# Altium PCB Kasli_BP_Adapter.PCBDOC (part 1 of 3)
Units mm, origin at the board's own origin, x right, y up, seen from the top; angles counter-clockwise.
Board outline 52.2 x 100 mm, 4 copper layers (TopLayer, MP(G), MidLayer1, BottomLayer), stack 1.65 mm thick; 18 components, 82 nets, 256 pads, 42 vias.
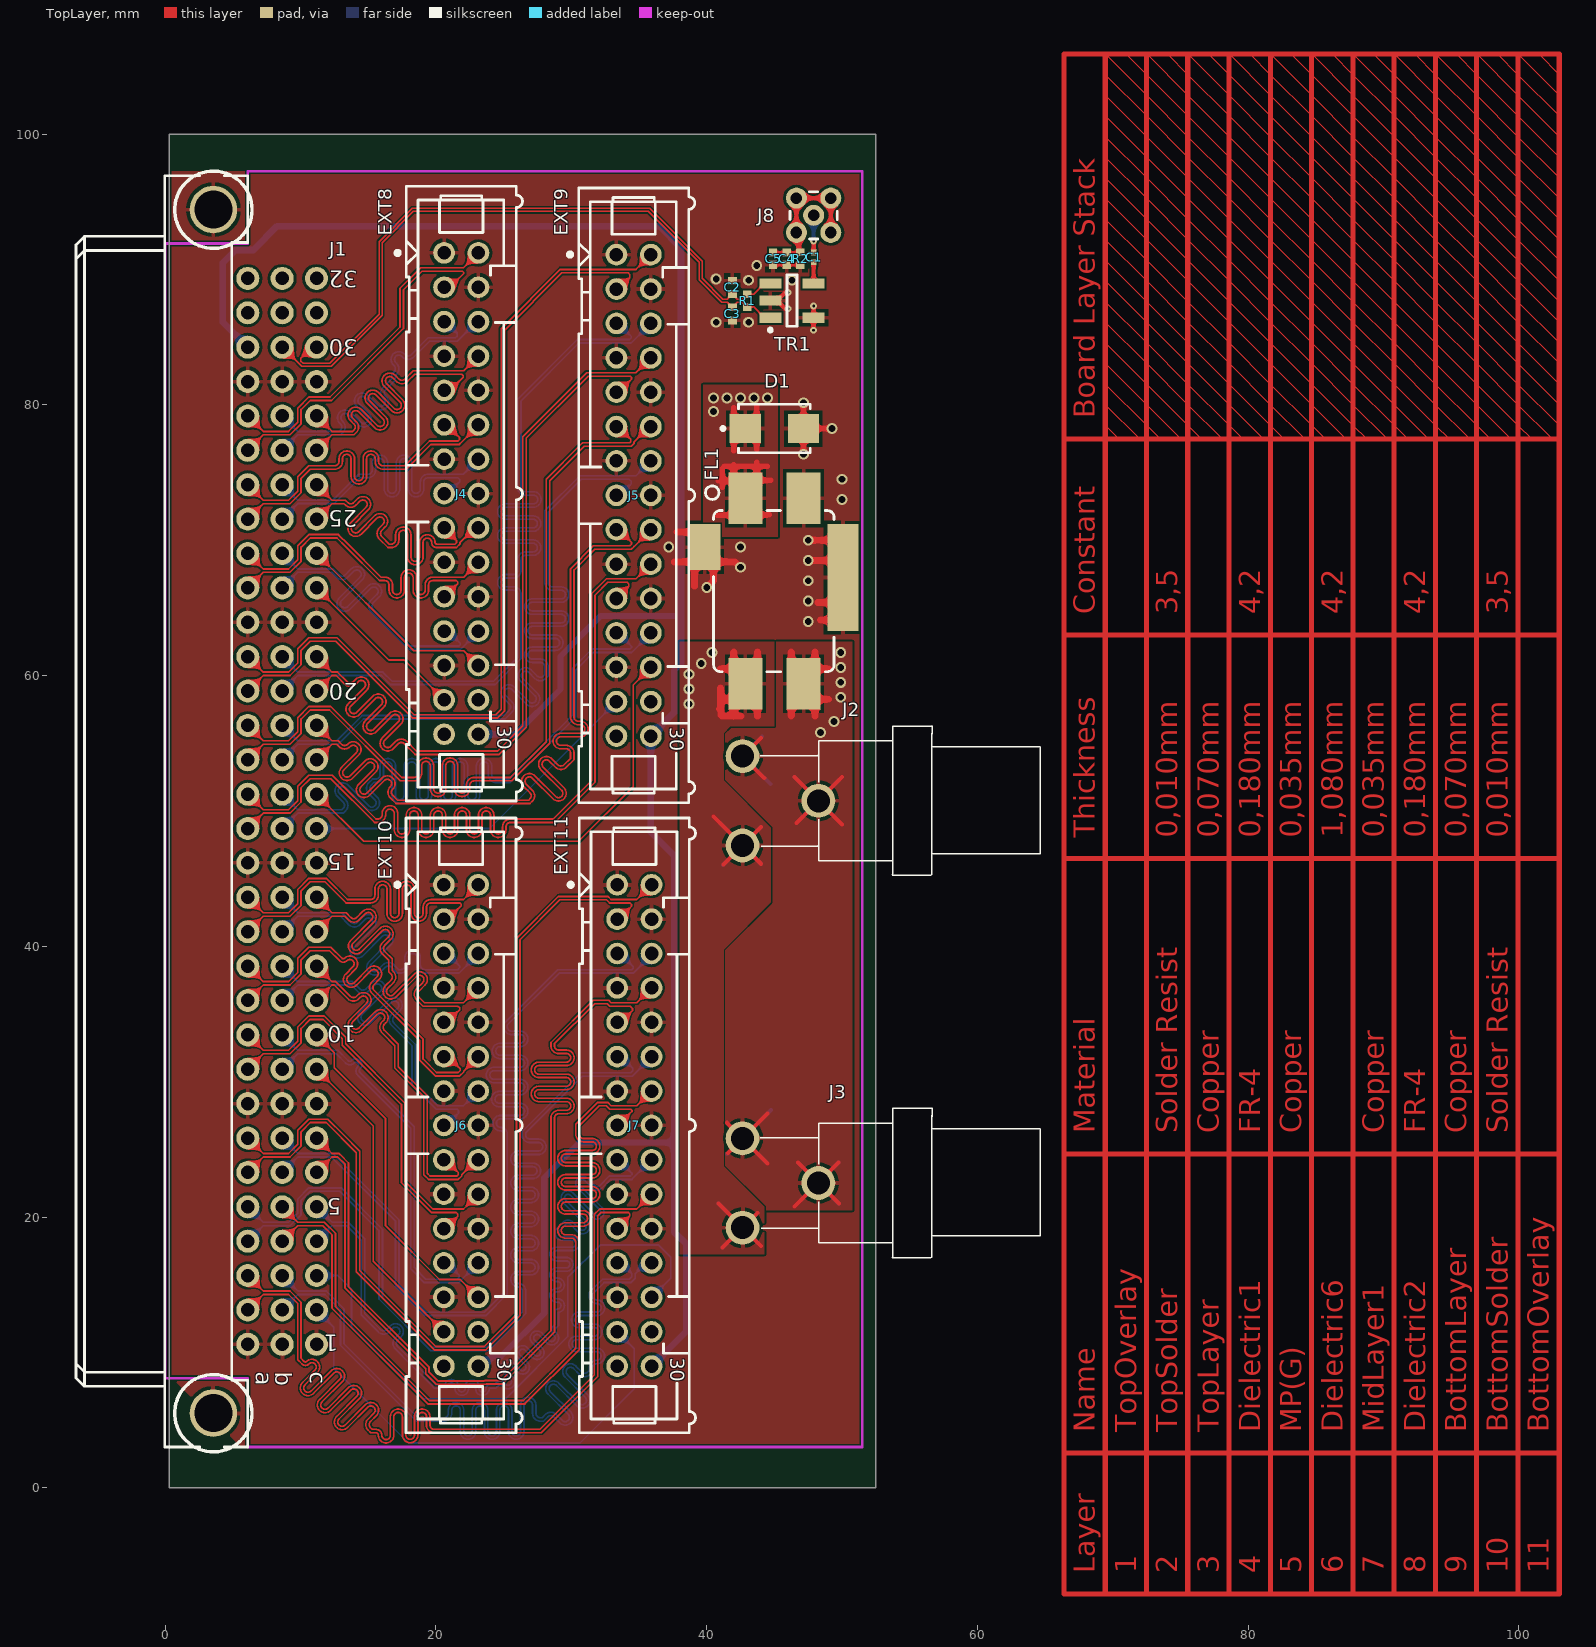
[diagram p0: TopLayer view]
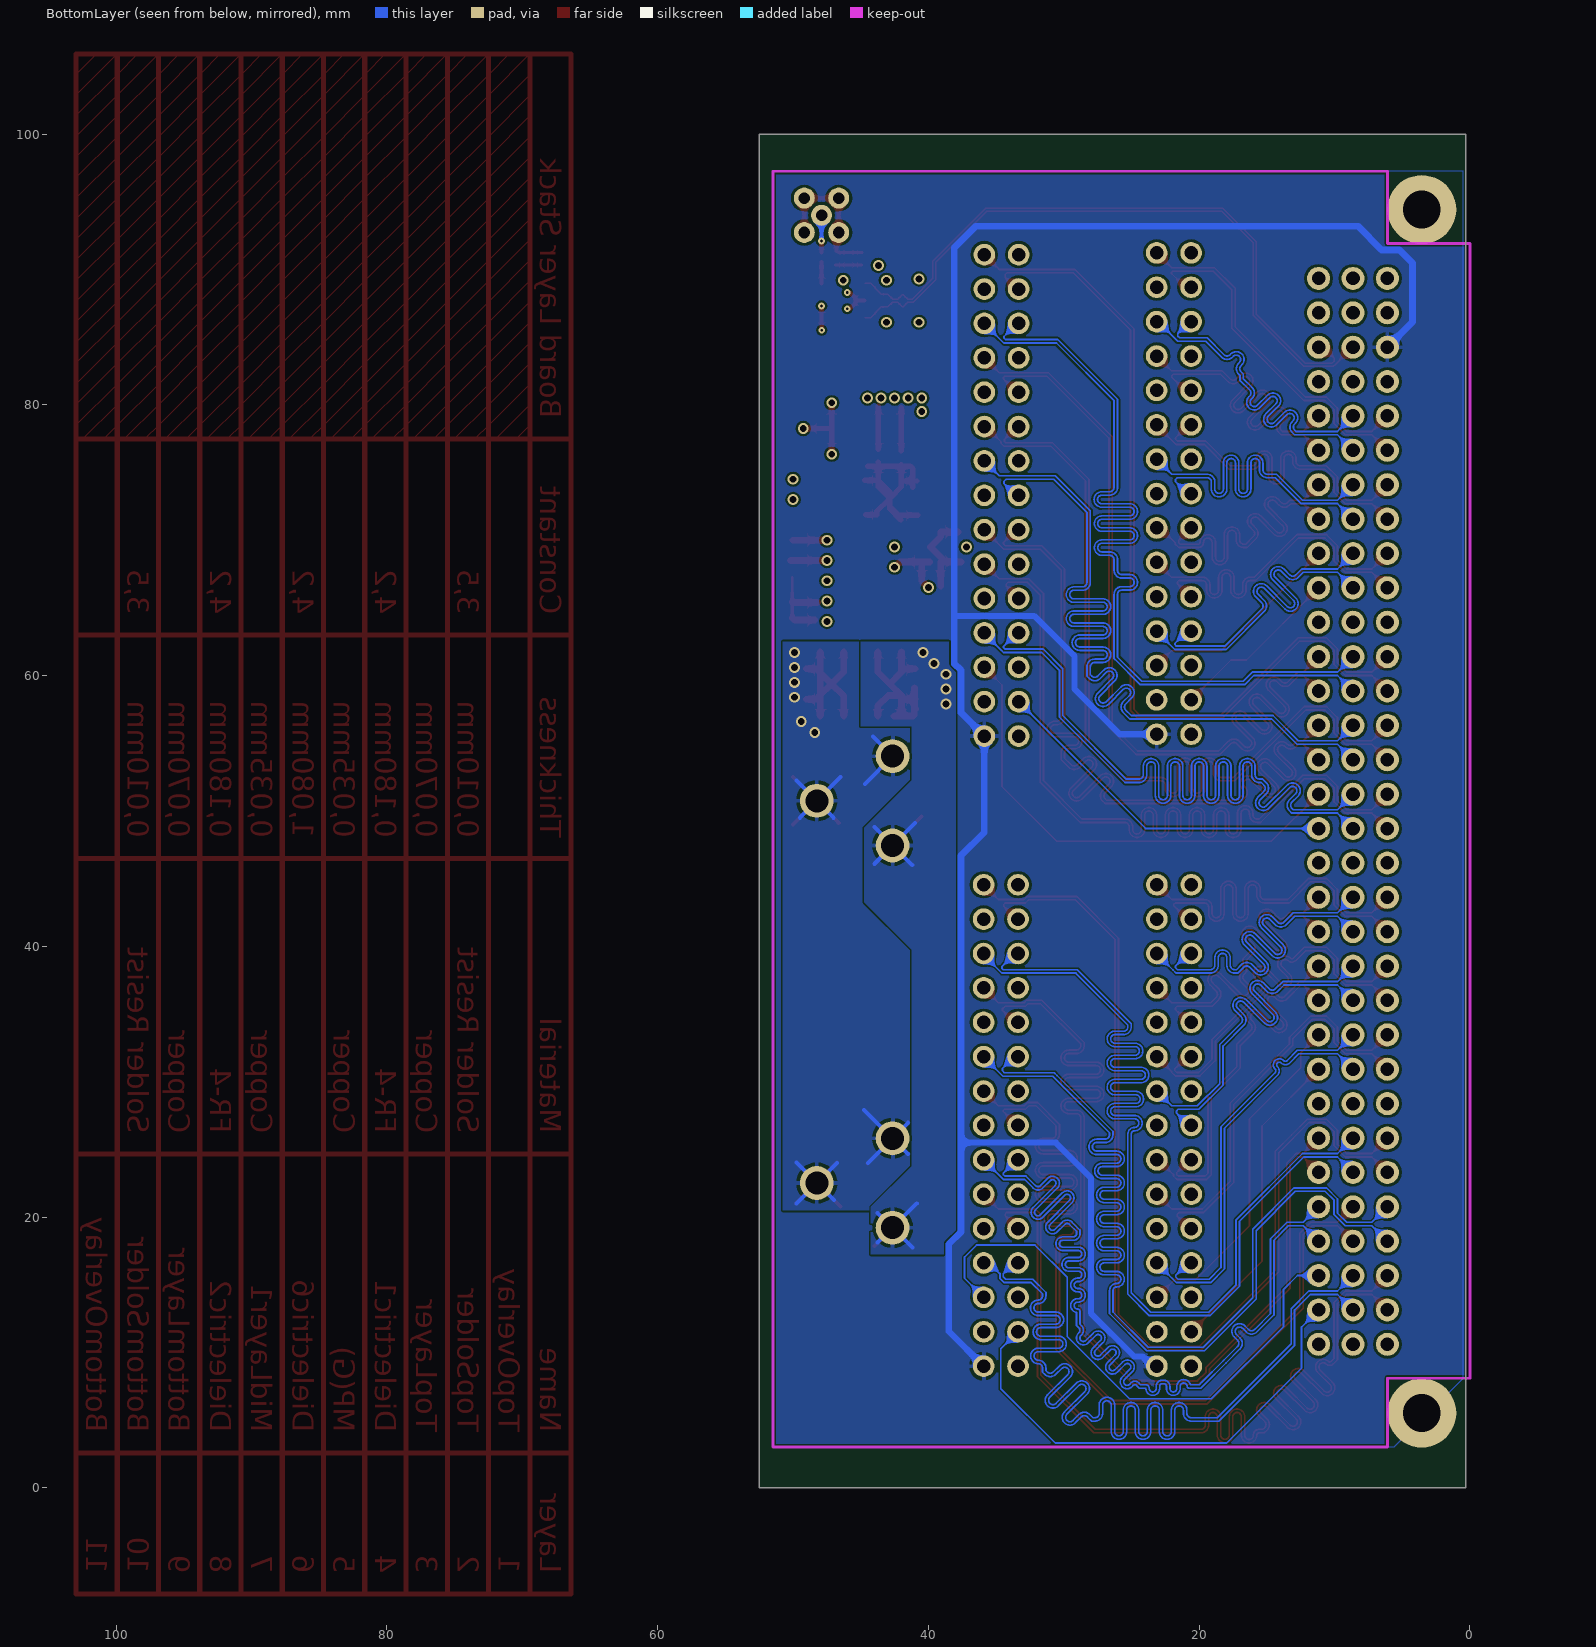
[diagram p1: BottomLayer view, seen from below]
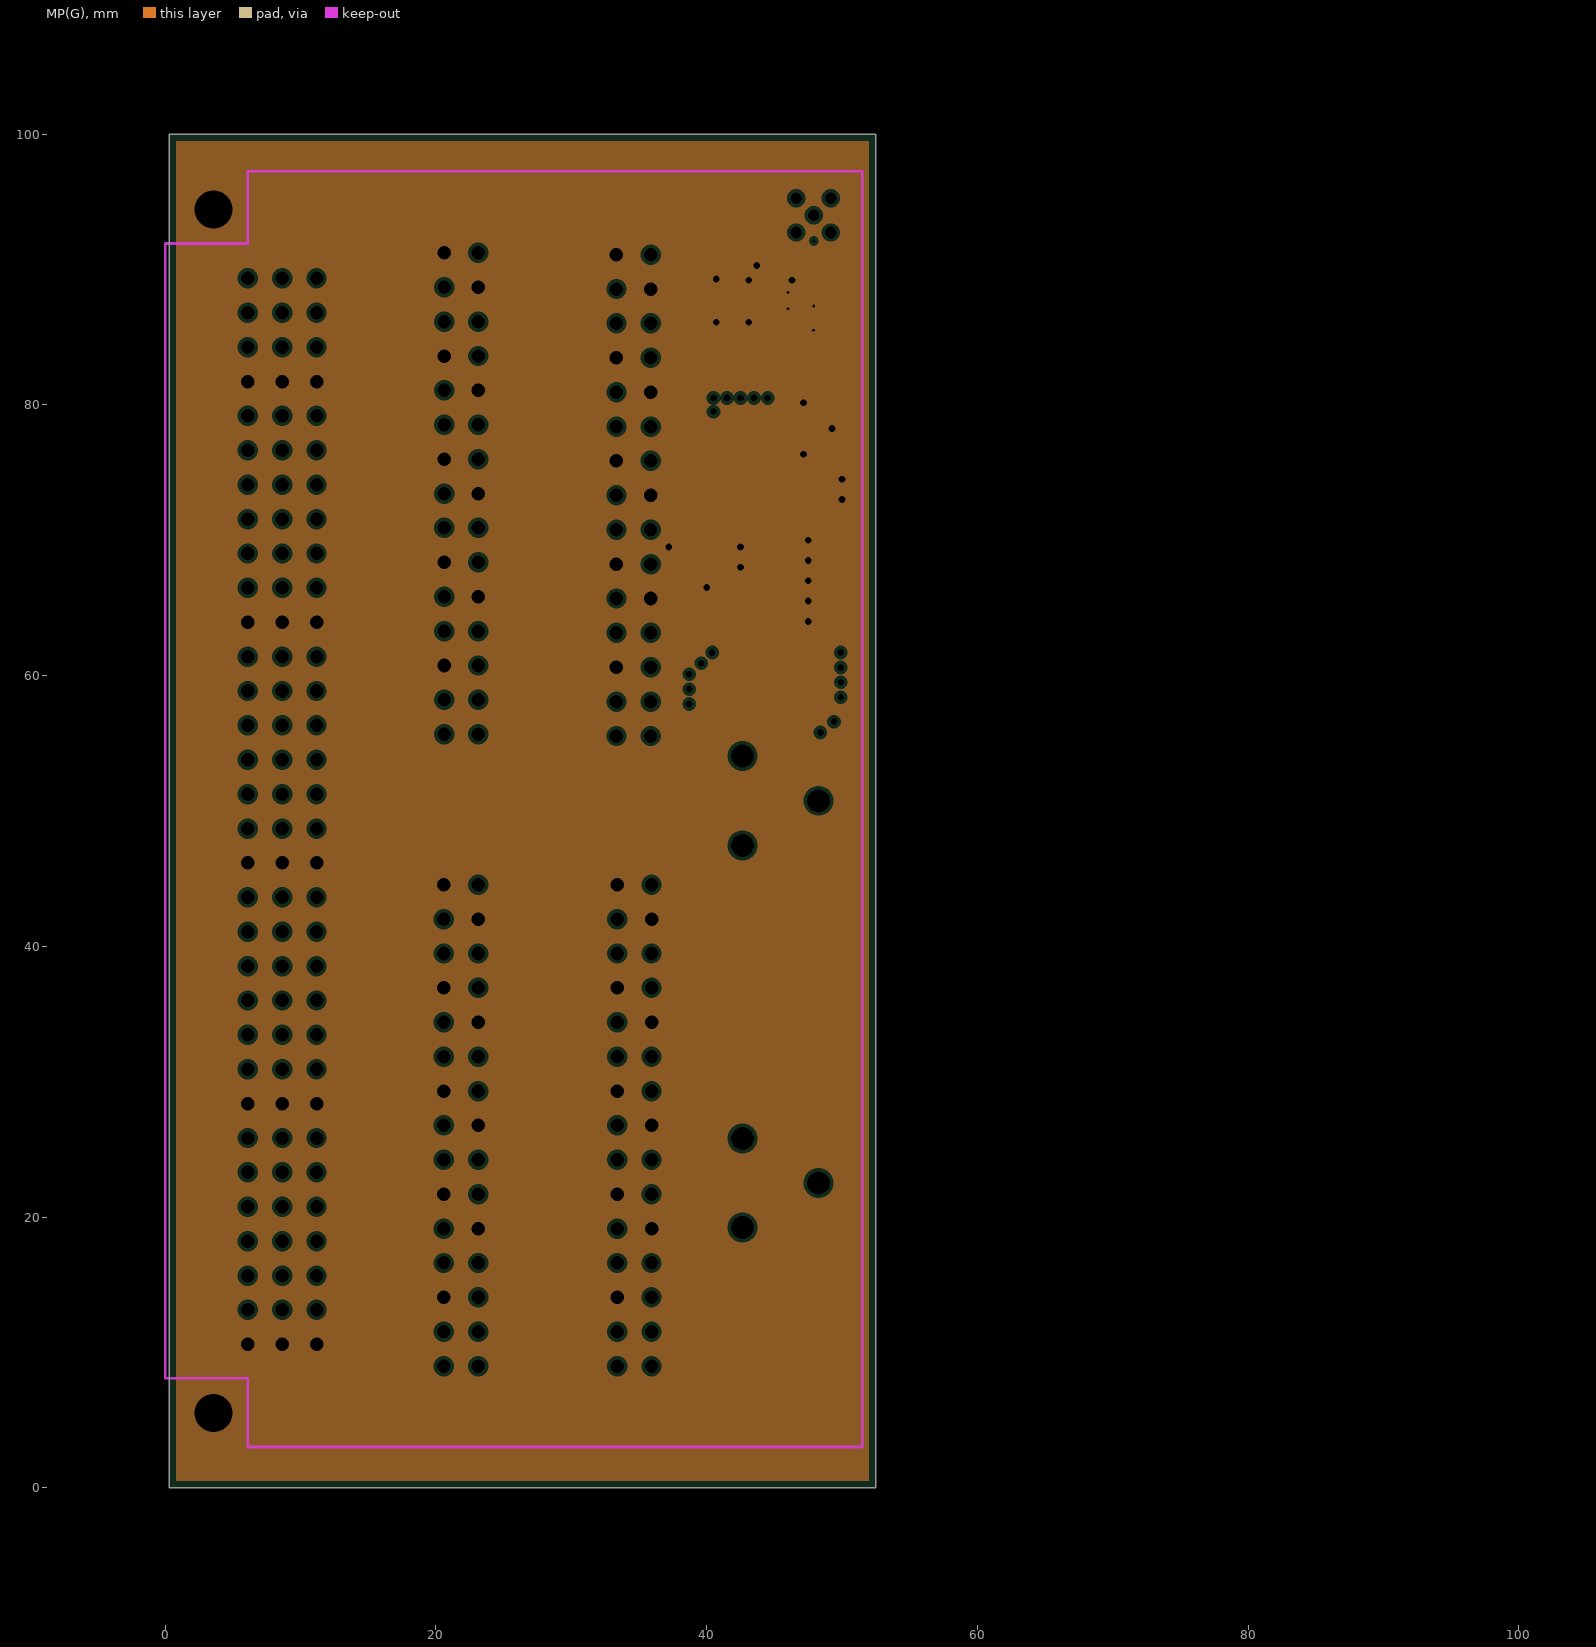
[diagram p2: MP(G), clearances drawn from the general rule]
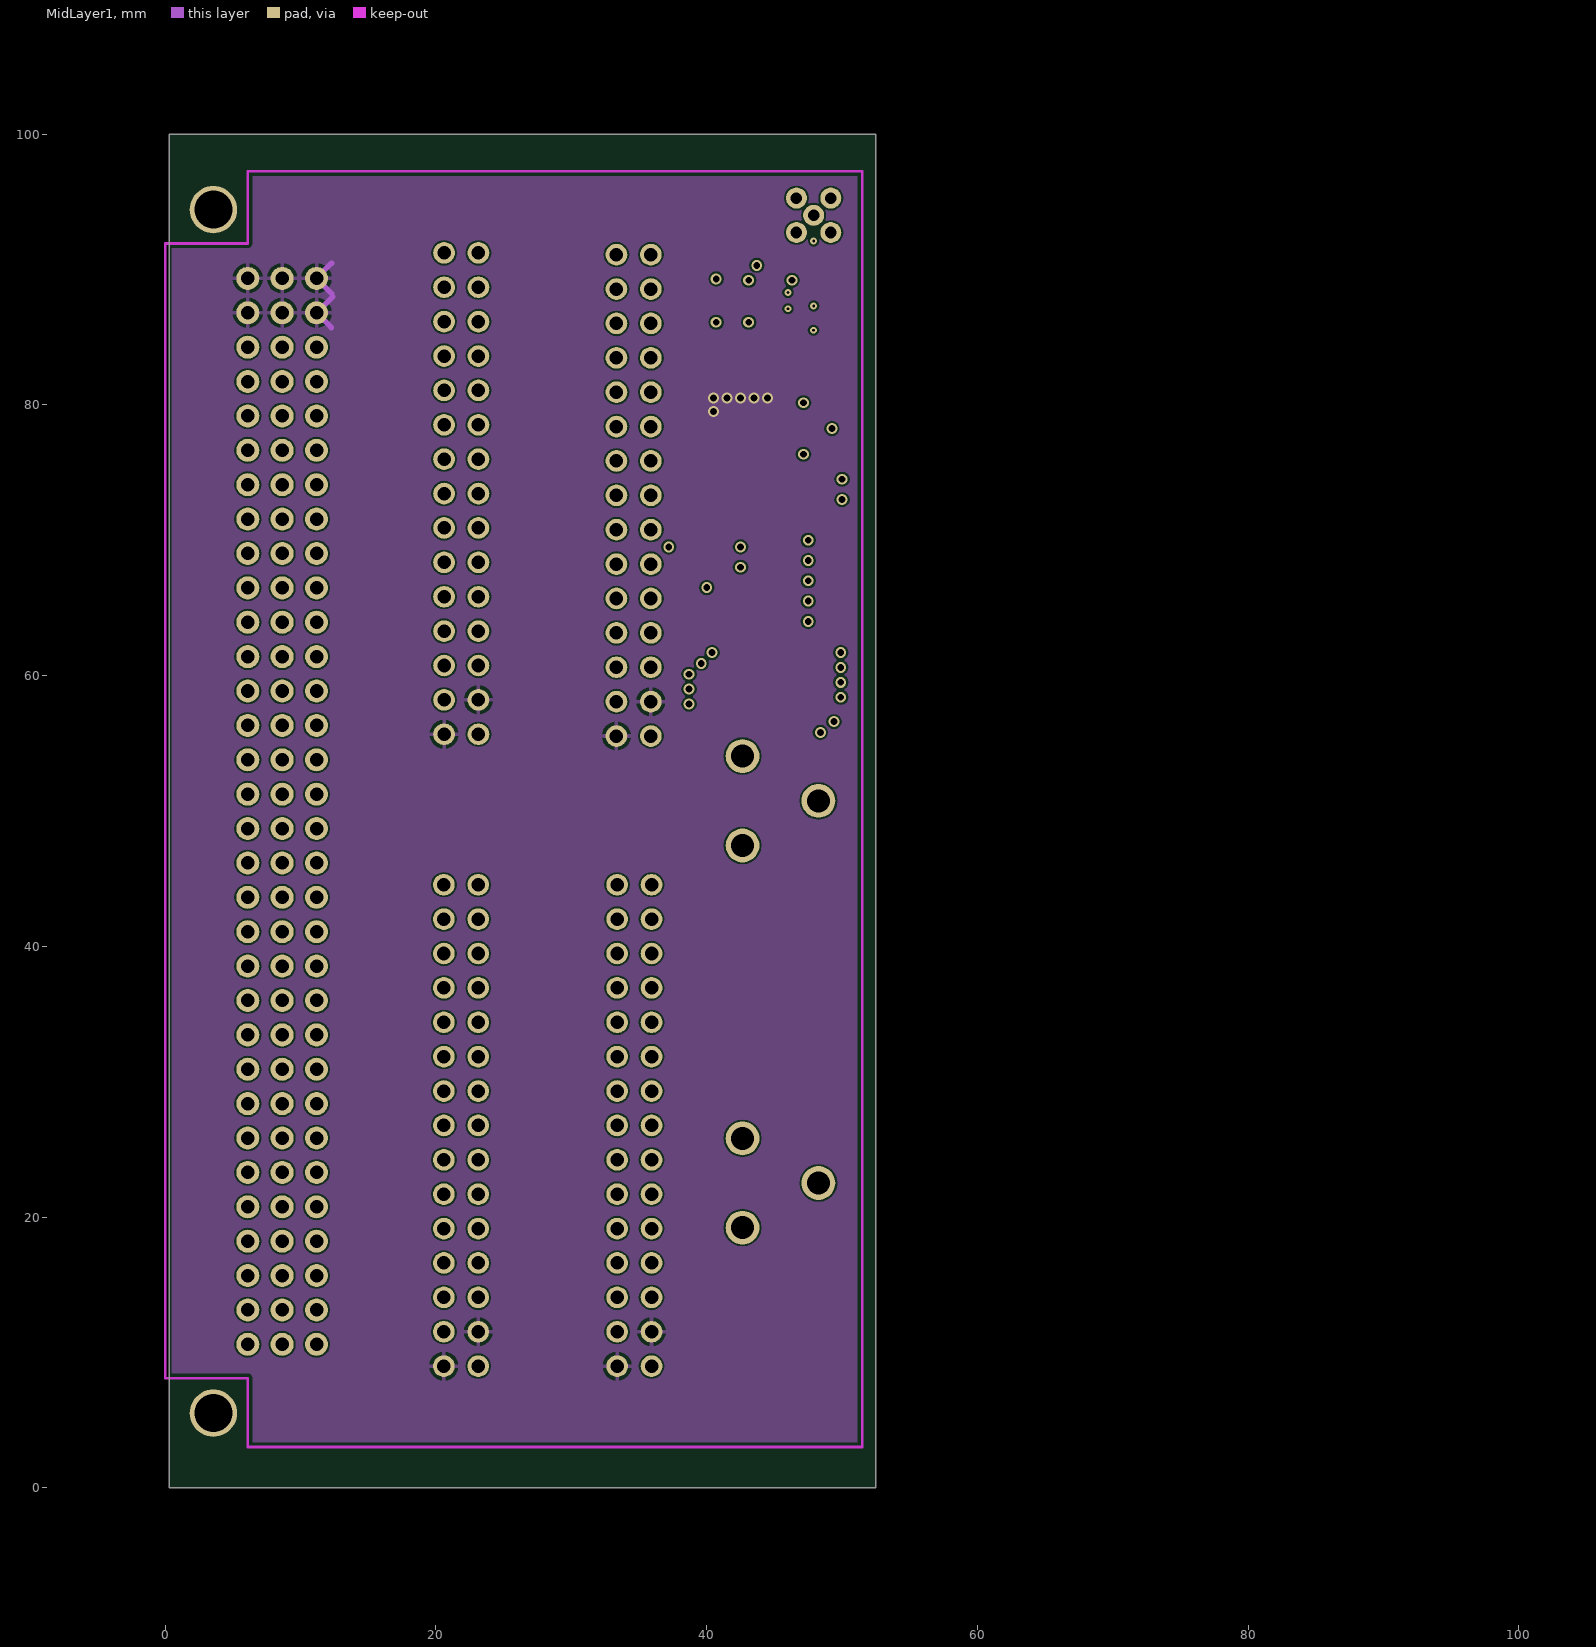
[diagram p3: MidLayer1]
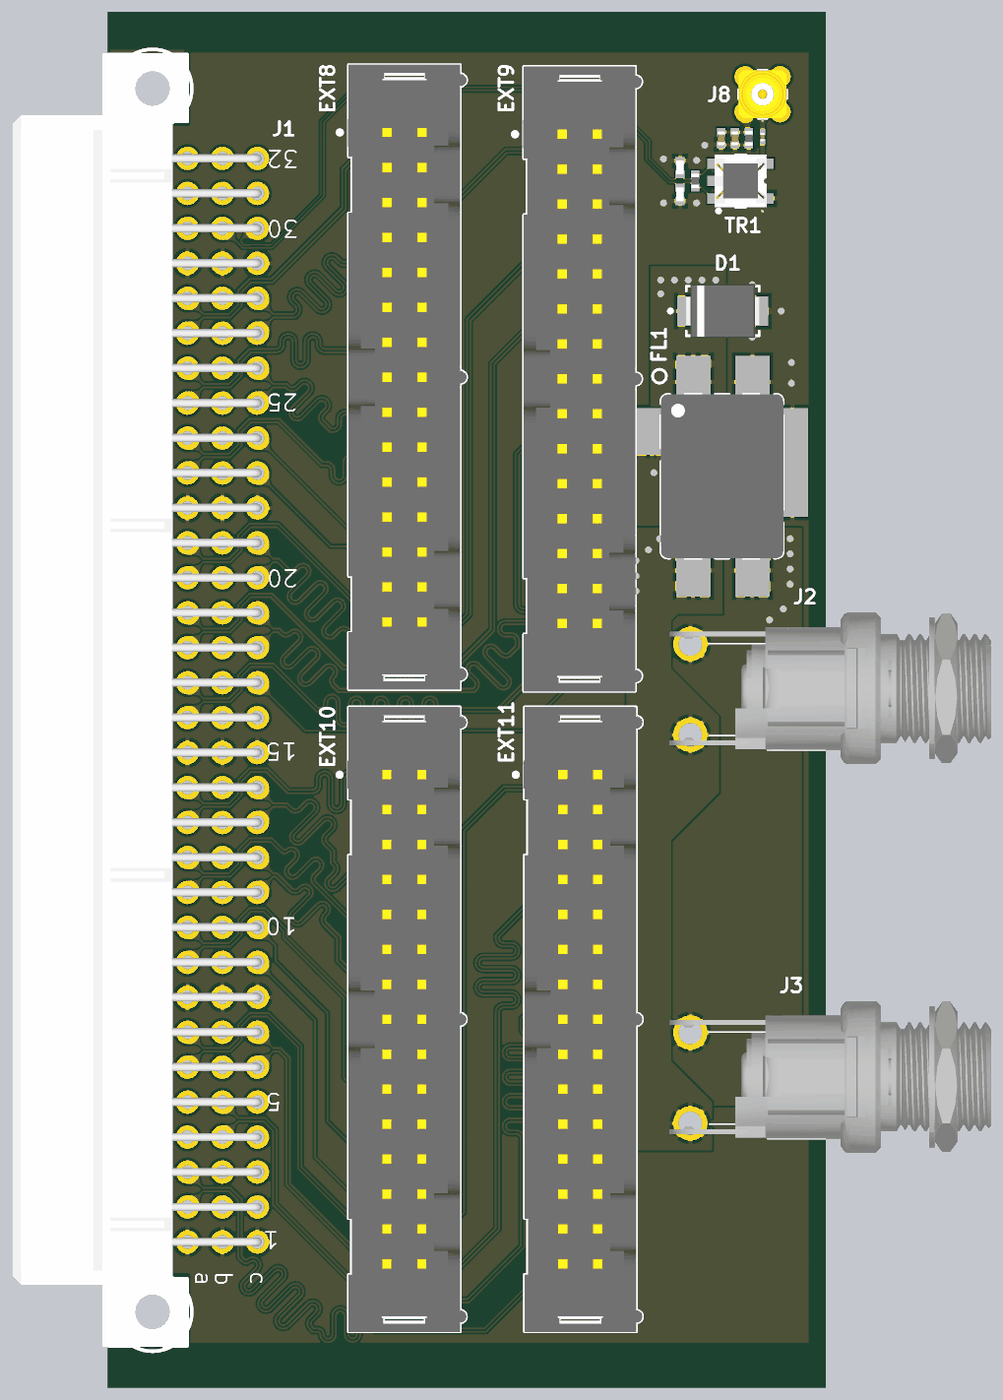
[diagram p5: 3D render of the assembled board from above, using the file's embedded part models]

## Layer stack, top to bottom
TopSolder: solder mask 0.0102, Solder Resist, Dk 3.5
TopLayer: signal copper 0.07
Dielectric1: prepreg 0.18, FR-4, Dk 4.2
MP(G): plane copper 0.035, net GND
Dielectric6: core 1.08, Dk 4.2
MidLayer1: signal copper 0.035
Dielectric2: prepreg 0.18, FR-4, Dk 4.2
BottomLayer: signal copper 0.07
BottomSolder: solder mask 0.0102, Solder Resist, Dk 3.5

## Board outline
0.3,0 0.3,100 52.5,100 52.5,0

## Design rules (kind name [scope] priority, off if disabled: settings)
AcuteAngle [All] p1: minimum=6.00000000000000E+0001 checktracksonly=FALSE
AssemblyTestPointUsage [All] p1 off:
AssemblyTestpoint [All] p1 off: testpointundercomponent=TRUE minsize=1.016 maxsize=2.54 preferedsize=1.524 minholesize=0 maxholesize=1.016 preferedholesize=0.813 testpointgrid=0.025 usegrid=TRUE gridtolerance=0 allowsidetop=TRUE allowsidebottom=TRUE
BoardOutlineClearance [All] p1: gap=0.4 ignorepadtopadclearanceinfootprint=FALSE
Clearance Clearance_poly_balancing [InNamedPolygon('BAL_TOP') or InNamedPolygon('BAL_BOT') or InNamedPolygon('ML1_BAL') or  InNamedPolygon('ML2_BAL')] p1: gap=0.152 ignorepadtopadclearanceinfootprint=FALSE
Clearance Clearance_via [IsVia vs IsVia] p2: gap=0.254 ignorepadtopadclearanceinfootprint=FALSE except(0: Arc-Hole Track-Hole SMDPad-Hole THPad-Hole Via-Hole Fill-Hole Poly-Hole Region-Hole Text-Hole; 0.076: Arc-Track Arc-SMDPad Track-Track Track-SMDPad SMDPad-SMDPad SMDPad-Fill SMDPad-Region THPad-Fill THPad-Region; 0.08: Arc-Arc; 0.1: Arc-Fill Arc-Region Track-Fill Track-Region Fill-Fill Fill-Region; 0.127: Arc-Poly Track-Poly SMDPad-Poly THPad-Poly Fill-Poly Poly-Poly Poly-Region Region-Region; 0.15: Arc-Via Track-Via SMDPad-Via Via-Via Via-Fill Via-Poly Via-Region; 0.2: Arc-THPad Track-THPad SMDPad-THPad THPad-THPad THPad-Via)
Clearance Clearance_inner_lvds_mid2 [(OnLayer('MidLayer2') AND InNetClass('Diff_100Ohm'))] p3 off: gap=0.54 ignorepadtopadclearanceinfootprint=FALSE except(0: Arc-Hole Track-Hole SMDPad-Hole THPad-Hole Via-Hole Fill-Hole Poly-Hole Region-Hole Text-Hole)
Clearance Clearance_inner_lvds_sign1 [(InDifferentialPairClass('All Differential Pairs'))] p4 off: gap=0.54 ignorepadtopadclearanceinfootprint=FALSE except(0: Arc-Hole Track-Hole SMDPad-Hole THPad-Hole Via-Hole Fill-Hole Poly-Hole Region-Hole Text-Hole; 0.1: Arc-SMDPad Track-SMDPad; 0.15: Arc-Via Track-Via SMDPad-Via; 0.2: Arc-THPad Track-THPad SMDPad-SMDPad THPad-Via Via-Via)
Clearance Clearance_ddr [IsTrack and (InNetClass('DDR_BL0') OR InNetClass('DDR_AddressAndControls')) vs IsTrack and (InNetClass('DDR_BL0') OR InNetClass('DDR_AddressAndControls'))] p5 off: gap=0.5 ignorepadtopadclearanceinfootprint=FALSE except(0: Arc-Hole Track-Hole SMDPad-Hole THPad-Hole Via-Hole Fill-Hole Poly-Hole Region-Hole Text-Hole; 0.15: Arc-Via Track-Via; 0.25: Arc-Arc Arc-Track Track-Track; 0.54: Via-Via Via-Fill Via-Poly Via-Region Via-Text Fill-Fill Fill-Poly Fill-Region Fill-Text Poly-Poly Poly-Region Poly-Text Region-Region Region-Text Text-Text)
Clearance Clearance_inner [(OnLayer('MidLayer1') OR OnLayer('MidLayer2') OR OnLayer('SignalLayer1'))] p6: gap=0.25 ignorepadtopadclearanceinfootprint=FALSE except(0: Arc-Hole Track-Hole SMDPad-Hole THPad-Hole Via-Hole Fill-Hole Poly-Hole Region-Hole Text-Hole; 0.076: Arc-Arc Arc-Track Arc-SMDPad Track-Track Track-SMDPad SMDPad-SMDPad SMDPad-Fill SMDPad-Region THPad-Fill THPad-Region; 0.1: Track-Region; 0.127: SMDPad-Poly THPad-Poly; 0.15: Arc-Via Track-Via Via-Fill Via-Poly Via-Region Region-Region; 0.2: SMDPad-Via THPad-Via; 0.254: Arc-Text Track-Text SMDPad-Text THPad-Text Via-Text Fill-Text Poly-Text Region-Text Text-Text)
Clearance [OnLayer('TopLayer') or OnLayer('BottomLayer')] p7: gap=0.127 ignorepadtopadclearanceinfootprint=FALSE except(0: Arc-Hole Track-Hole SMDPad-Hole THPad-Hole Via-Hole Fill-Hole Poly-Hole Region-Hole Text-Hole; 0.125: Arc-Arc Arc-Track Arc-SMDPad Track-Track Track-SMDPad SMDPad-SMDPad; 0.15: Arc-Via Track-Via SMDPad-Via; 0.152: Via-Fill Via-Poly Via-Region; 0.2: SMDPad-THPad THPad-THPad THPad-Via THPad-Fill THPad-Poly THPad-Region; 0.229: Arc-THPad Track-THPad; 0.254: Arc-Text Track-Text SMDPad-Text THPad-Text Via-Text Fill-Text Poly-Text Region-Text Text-Text; 0.275: Via-Via)
ComponentClearance [All] p1 off: gap=0.254 collisioncheckmode=3 verticalgap=0.254 showdistances=FALSE
DiffPairsRouting DiffPairsRouting_lvpecl [InDifferentialPairClass('LVPECL')] p1: maxlimit=0.25 minlimit=0.125 mostfreqgap=0.25 toplayer_maxgap=0.125 toplayer_prefgap=0.125 toplayer_minwidth=0.095 toplayer_maxwidth=0.095 toplayer_prefwidth=0.095 midlayer1_mingap=0.25 midlayer1_minwidth=0.15 midlayer1_maxwidth=0.15 midlayer1_prefwidth=0.15 bottomlayer_maxgap=0.125 bottomlayer_prefgap=0.125 bottomlayer_minwidth=0.095 bottomlayer_maxwidth=0.095 bottomlayer_prefwidth=0.095 maxuncoupledlength=3
DiffPairsRouting DiffPairsRouting_100_Ohm [InDifferentialPairClass('Diff_100Ohm')] p2: maxlimit=0.25 minlimit=0.127 mostfreqgap=0.25 toplayer_maxgap=0.127 toplayer_prefgap=0.127 toplayer_minwidth=0.127 toplayer_maxwidth=0.127 toplayer_prefwidth=0.127 midlayer1_mingap=0.25 midlayer1_minwidth=0.15 midlayer1_maxwidth=0.15 midlayer1_prefwidth=0.15 bottomlayer_maxgap=0.127 bottomlayer_prefgap=0.127 bottomlayer_minwidth=0.127 bottomlayer_maxwidth=0.127 bottomlayer_prefwidth=0.127 maxuncoupledlength=10
DiffPairsRouting DiffPairsRouting_90_Ohm [InDifferentialPairClass('Diff_90Ohm')] p3: maxlimit=0.15 minlimit=0.125 mostfreqgap=0.15 toplayer_mingap=0.15 toplayer_minwidth=0.135 toplayer_maxwidth=0.135 toplayer_prefwidth=0.135 midlayer1_maxgap=0.125 midlayer1_prefgap=0.125 midlayer1_minwidth=0.312 midlayer1_maxwidth=0.312 midlayer1_prefwidth=0.312 bottomlayer_mingap=0.15 bottomlayer_minwidth=0.135 bottomlayer_maxwidth=0.135 bottomlayer_prefwidth=0.135 maxuncoupledlength=12.7
DiffPairsRouting [All] p4 off: maxlimit=0.254 minlimit=0.12 mostfreqgap=0.125 toplayer_minwidth=0.075 toplayer_maxwidth=0.5 toplayer_prefwidth=0.125 midlayer1_minwidth=0.075 midlayer1_maxwidth=0.5 midlayer1_prefwidth=0.125 bottomlayer_minwidth=0.075 bottomlayer_maxwidth=0.5 bottomlayer_prefwidth=0.125 maxuncoupledlength=3
FabricationTestPointUsage TestPointUsage [All] p1: valid=0 allowmultiple=FALSE
FabricationTestpoint Testpoint [All] p1: side=3 testpointundercomponent=TRUE minsize=1.016 maxsize=2.54 preferedsize=1.524 minholesize=0.508 maxholesize=1.016 preferedholesize=0.813 testpointgrid=0.025 allowsidetop=TRUE allowsidebottom=TRUE usegrid=TRUE gridtolerance=0
Height Height_1 [OnLayer('BottomLayer')] p1: minheight=0 maxheight=2 prefheight=1
Height [All] p2: minheight=0 maxheight=25.4 prefheight=12.7
HoleSize [All] p1: absolutevalues=TRUE maxlimit=3.2 minlimit=0.15 maxpercent=80.000 minpercent=20.000
HoleToHoleClearance [All] p1: gap=0.15 allowstackedmicrovias=TRUE
MatchedLengths MatchedLengths_sfp [InDifferentialPairClass('SFP_RX_TX')] p1: tolerance=1 checknetsindiffpair=TRUE checkdiffpairvsdiffpair=FALSE checkxsignals=FALSE checkothers=FALSE
MatchedLengths MatchedLengths_diff_clocks [InxSignalClass('Differential clocks')] p2: tolerance=1 checknetsindiffpair=TRUE checkdiffpairvsdiffpair=FALSE checkxsignals=FALSE checkothers=FALSE
MatchedLengths MatchLengths_xSignals_clock_fanout [InxSignalClass('Clock fanout')] p3: tolerance=1 checknetsindiffpair=FALSE checkdiffpairvsdiffpair=TRUE checkxsignals=TRUE checkothers=TRUE
MatchedLengths MatchedLengths_ext11 [InDifferentialPairClass('EXT11')] p4: tolerance=1 checknetsindiffpair=FALSE checkdiffpairvsdiffpair=TRUE checkxsignals=TRUE checkothers=TRUE
MatchedLengths MatchedLengths_ext10 [InDifferentialPairClass('EXT10')] p5: tolerance=1 checknetsindiffpair=FALSE checkdiffpairvsdiffpair=TRUE checkxsignals=TRUE checkothers=TRUE
MatchedLengths MatchedLengths_ext9 [InDifferentialPairClass('EXT9')] p6: tolerance=1 checknetsindiffpair=FALSE checkdiffpairvsdiffpair=TRUE checkxsignals=TRUE checkothers=TRUE
MatchedLengths MatchedLengths_ext8 [InDifferentialPairClass('EXT8')] p7: tolerance=1 checknetsindiffpair=FALSE checkdiffpairvsdiffpair=TRUE checkxsignals=TRUE checkothers=TRUE
MatchedLengths [InDifferentialPairClass('All Differential Pairs')] p8: tolerance=5 checknetsindiffpair=TRUE checkdiffpairvsdiffpair=FALSE checkxsignals=FALSE checkothers=FALSE
MinimumAnnularRing MinimumAnnularRing_mid [OnLayer('MidLayer1') or OnLayer('MidLayer2') or OnLayer('MidLayer3') or OnLayer('MidLayer4')] p1: minimumring=0.15
MinimumAnnularRing MinimumAnnularRing_outer [OnLayer('TopLayer') or OnLayer('BottomLayer')] p2: minimumring=0.05
MinimumSolderMaskSliver [All] p1: minsoldermaskwidth=0.075
ParallelSegment [All] p1 off: limit=5 gap=0.254
PlaneClearance [All] p1: clearance=0.254
PlaneConnect [All] p1: pad.planeconnectstyle=Relief pad.reliefexpansion=0.2 pad.reliefentries=4 pad.reliefconductorwidth=0.254 pad.reliefairgap=0.254 via.planeconnectstyle=Direct via.reliefexpansion=0.2 via.reliefentries=4 via.reliefconductorwidth=0.254 via.reliefairgap=0.15
PolygonConnect PolygonConnect_pad [IsPad] p1: connectstyle=Relief reliefconductorwidth=0.3 reliefentries=4 polygonreliefangle="90 Angle" airgapwidth=0.254
PolygonConnect [All] p2: connectstyle=Direct reliefconductorwidth=0.254 reliefentries=4 polygonreliefangle="45 Angle" airgapwidth=0.254
RoomDefinition Connectors [InComponentClass('Connectors')] p1: confinementstyle=ConfineIn formatcopy=TRUE lockcomponents=FALSE outline -101.6,-152.4 -50.8,-152.4 -50.8,-127 -101.6,-127
RoomDefinition Kasli_BP_Adapter [InComponentClass('Kasli_BP_Adapter')] p2 off: confinementstyle=ConfineIn formatcopy=TRUE lockcomponents=FALSE outline 53.167,9.958 53.167,56.082 63.295,56.082 63.295,48.97 146.607,48.97 146.607,2.846 65.069,2.846 65.069,9.958
RoutingLayers RoutingLayers_1 [InNetClass('Diff_100Ohm')] p1: top layer_v5=TRUE mid layer 1_v5=FALSE bottom layer_v5=TRUE
RoutingLayers [All] p2: top layer_v5=TRUE mid layer 1_v5=TRUE bottom layer_v5=TRUE
RoutingTopology RoutingTopology_DDRAddressAndControls [InNetClass('DDR_AddressAndControls')] p1: topology=Daisy_Simple
RoutingTopology [All] p2: topology=Shortest
RoutingVias [All] p1: holewidth=0.15 width=0.35 viastyle="Through Hole" minholewidth=0.15 minwidth=0.35 maxholewidth=0.6 maxwidth=0.8
SMDEntry [All] p1 off: side=TRUE corner=TRUE anyangle=FALSE
SilkToSilkClearance [All] p1: silktosilkclearance=0.15
SilkToSolderMaskClearance SilkscreenOverComponentPads [IsPad] p1: minsilkscreentomaskgap=0.15 clearancetoexposedcopper=FALSE
SolderMaskExpansion [All] p1: expansion=0.05
StubLength [All] p1: limit=3
UnConnectedPin [All] p1 off:
ViasUnderSMD ViasUnderSMD_1 [(InNet('GND') AND (InComponent('IC1') or InComponent('IC2') or InComponent('IC3') or InComponent('IC14') or InComponent('IC15') or InComponent('IC18')))] p1: allowed=TRUE
ViasUnderSMD [All] p2: allowed=FALSE
Width Width_50Ohm [InNetClass('50Ohm')] p1: maxlimit=1 minlimit=0.3 preferedwidth=0.65 toplayer_maxwidth=0.3 toplayer_prefwidth=0.3 bottomlayer_maxwidth=0.3 bottomlayer_prefwidth=0.3 minimp=50.000000 maximp=50.000000 favimp=50.000000
Width [All] p2: maxlimit=2 minlimit=0.127 preferedwidth=0.127 minimp=50.000000 maximp=50.000000 favimp=50.000000
14 further rules are at their usual default settings.

## Classes and differential pairs
component class Connectors: J2 J3
net class 50Ohm: NetC1_1 NetC1_2
net class I2C_SCL_[11..8]: I2C_SCL_8 I2C_SCL_9 I2C_SCL_10 I2C_SCL_11
net class I2C_SDA_[11..8]: I2C_SDA_8 I2C_SDA_9 I2C_SDA_10 I2C_SDA_11
net class Diff_100Ohm: EXT8.LVDS_0_N EXT8.LVDS_0_P EXT8.LVDS_1_N EXT8.LVDS_1_P EXT8.LVDS_2_N EXT8.LVDS_2_P EXT8.LVDS_3_N EXT8.LVDS_3_P EXT8.LVDS_4_N EXT8.LVDS_4_P EXT8.LVDS_5_N EXT8.LVDS_5_P EXT8.LVDS_6_N EXT8.LVDS_6_P EXT8.LVDS_7_N EXT8.LVDS_7_P EXT9.LVDS_0_N EXT9.LVDS_0_P EXT9.LVDS_1_N EXT9.LVDS_1_P EXT9.LVDS_2_N EXT9.LVDS_2_P EXT9.LVDS_3_N EXT9.LVDS_3_P EXT9.LVDS_4_N EXT9.LVDS_4_P EXT9.LVDS_5_N EXT9.LVDS_5_P EXT9.LVDS_6_N EXT9.LVDS_6_P EXT9.LVDS_7_N EXT9.LVDS_7_P EXT10.LVDS_0_N EXT10.LVDS_0_P EXT10.LVDS_1_N EXT10.LVDS_1_P EXT10.LVDS_2_N EXT10.LVDS_2_P EXT10.LVDS_3_N EXT10.LVDS_3_P EXT10.LVDS_4_N EXT10.LVDS_4_P EXT10.LVDS_5_N EXT10.LVDS_5_P EXT10.LVDS_6_N EXT10.LVDS_6_P EXT10.LVDS_7_N EXT10.LVDS_7_P EXT11.LVDS_0_N EXT11.LVDS_0_P EXT11.LVDS_1_N EXT11.LVDS_1_P EXT11.LVDS_2_N EXT11.LVDS_2_P EXT11.LVDS_3_N EXT11.LVDS_3_P EXT11.LVDS_4_N EXT11.LVDS_4_P EXT11.LVDS_5_N EXT11.LVDS_5_P EXT11.LVDS_6_N EXT11.LVDS_6_P EXT11.LVDS_7_N EXT11.LVDS_7_P
net class LVPECL: CLK_EXT_N CLK_EXT_P
differential pair class Diff_100Ohm: EXT8.LVDS_0 EXT8.LVDS_1 EXT8.LVDS_2 EXT8.LVDS_3 EXT8.LVDS_4 EXT8.LVDS_5 EXT8.LVDS_6 EXT8.LVDS_7 EXT9.LVDS_0 EXT9.LVDS_1 EXT9.LVDS_2 EXT9.LVDS_3 EXT9.LVDS_4 EXT9.LVDS_5 EXT9.LVDS_6 EXT9.LVDS_7 EXT10.LVDS_0 EXT10.LVDS_1 EXT10.LVDS_2 EXT10.LVDS_3 EXT10.LVDS_4 EXT10.LVDS_5 EXT10.LVDS_6 EXT10.LVDS_7 EXT11.LVDS_0 EXT11.LVDS_1 EXT11.LVDS_2 EXT11.LVDS_3 EXT11.LVDS_4 EXT11.LVDS_5 EXT11.LVDS_6 EXT11.LVDS_7
differential pair class LVPECL: CLK_EXT
differential pair class EXT8: EXT8.LVDS_0 EXT8.LVDS_1 EXT8.LVDS_2 EXT8.LVDS_3 EXT8.LVDS_4 EXT8.LVDS_5 EXT8.LVDS_6 EXT8.LVDS_7
differential pair class EXT9: EXT9.LVDS_0 EXT9.LVDS_1 EXT9.LVDS_2 EXT9.LVDS_3 EXT9.LVDS_4 EXT9.LVDS_5 EXT9.LVDS_6 EXT9.LVDS_7
differential pair class EXT10: EXT10.LVDS_0 EXT10.LVDS_1 EXT10.LVDS_2 EXT10.LVDS_3 EXT10.LVDS_4 EXT10.LVDS_5 EXT10.LVDS_6 EXT10.LVDS_7
differential pair class EXT11: EXT11.LVDS_0 EXT11.LVDS_1 EXT11.LVDS_2 EXT11.LVDS_3 EXT11.LVDS_4 EXT11.LVDS_5 EXT11.LVDS_6 EXT11.LVDS_7
differential pair CLK_EXT: +CLK_EXT_P -CLK_EXT_N
differential pair EXT8.LVDS_0: +EXT8.LVDS_0_P -EXT8.LVDS_0_N
differential pair EXT8.LVDS_1: +EXT8.LVDS_1_P -EXT8.LVDS_1_N
differential pair EXT8.LVDS_2: +EXT8.LVDS_2_P -EXT8.LVDS_2_N
differential pair EXT8.LVDS_3: +EXT8.LVDS_3_P -EXT8.LVDS_3_N
differential pair EXT8.LVDS_4: +EXT8.LVDS_4_P -EXT8.LVDS_4_N
differential pair EXT8.LVDS_5: +EXT8.LVDS_5_P -EXT8.LVDS_5_N
differential pair EXT8.LVDS_6: +EXT8.LVDS_6_P -EXT8.LVDS_6_N
differential pair EXT8.LVDS_7: +EXT8.LVDS_7_P -EXT8.LVDS_7_N
differential pair EXT9.LVDS_0: +EXT9.LVDS_0_P -EXT9.LVDS_0_N
differential pair EXT9.LVDS_1: +EXT9.LVDS_1_P -EXT9.LVDS_1_N
differential pair EXT9.LVDS_2: +EXT9.LVDS_2_P -EXT9.LVDS_2_N
differential pair EXT9.LVDS_3: +EXT9.LVDS_3_P -EXT9.LVDS_3_N
differential pair EXT9.LVDS_4: +EXT9.LVDS_4_P -EXT9.LVDS_4_N
differential pair EXT9.LVDS_5: +EXT9.LVDS_5_P -EXT9.LVDS_5_N
differential pair EXT9.LVDS_6: +EXT9.LVDS_6_P -EXT9.LVDS_6_N
differential pair EXT9.LVDS_7: +EXT9.LVDS_7_P -EXT9.LVDS_7_N
differential pair EXT10.LVDS_0: +EXT10.LVDS_0_P -EXT10.LVDS_0_N
differential pair EXT10.LVDS_1: +EXT10.LVDS_1_P -EXT10.LVDS_1_N
differential pair EXT10.LVDS_2: +EXT10.LVDS_2_P -EXT10.LVDS_2_N
differential pair EXT10.LVDS_3: +EXT10.LVDS_3_P -EXT10.LVDS_3_N
differential pair EXT10.LVDS_4: +EXT10.LVDS_4_P -EXT10.LVDS_4_N
differential pair EXT10.LVDS_5: +EXT10.LVDS_5_P -EXT10.LVDS_5_N
differential pair EXT10.LVDS_6: +EXT10.LVDS_6_P -EXT10.LVDS_6_N
differential pair EXT10.LVDS_7: +EXT10.LVDS_7_P -EXT10.LVDS_7_N
differential pair EXT11.LVDS_0: +EXT11.LVDS_0_P -EXT11.LVDS_0_N
differential pair EXT11.LVDS_1: +EXT11.LVDS_1_P -EXT11.LVDS_1_N
differential pair EXT11.LVDS_2: +EXT11.LVDS_2_P -EXT11.LVDS_2_N
differential pair EXT11.LVDS_3: +EXT11.LVDS_3_P -EXT11.LVDS_3_N
differential pair EXT11.LVDS_4: +EXT11.LVDS_4_P -EXT11.LVDS_4_N
differential pair EXT11.LVDS_5: +EXT11.LVDS_5_P -EXT11.LVDS_5_N
differential pair EXT11.LVDS_6: +EXT11.LVDS_6_P -EXT11.LVDS_6_N
differential pair EXT11.LVDS_7: +EXT11.LVDS_7_P -EXT11.LVDS_7_N

## Components (designator, comment, footprint, x,y, rotation, side; value= is the part's Value field where it differs from the comment)
C1 "100nF" CAPC0603X33N 47.9,90.9 r90 top
C2 "0.5pF" CAPC1005X50N 41.9,88.675 r270 top
C3 "0.5pF" CAPC1005X50N 41.9,86.725 r270 top
C4 "10nF" CAPC1005X55N 45.9,90.8 r90 top
C5 "10nF" CAPC1005X55N 44.9,90.8 r90 top
D1 "SMBJ12A" DIOM5336X265N 45,78.25 r0 top
FL1 "10A/50VDC" FIL_MURATA_BNX02 44.958,66.243 r90 top
J1 "DIN 41612 Type R" "HARTING_09 73 296 6801" 6.1,10.6 r180 top locked
J2 "Jack" SWITCHCRAFT_L712RA 42.65,47.45 r180 top locked
J3 "Jack" SWITCHCRAFT_L712RA 42.65,19.217 r180 top locked
J4 "=Familly" 3M_N2530-6002RB 21.87,73.445 r270 top locked
J5 "=Familly" 3M_N2530-6002RB 34.605,73.315 r270 top locked
J6 "=Familly" 3M_N2530-6002RB 21.855,26.77 r270 top locked
J7 "=Familly" 3M_N2530-6002RB 34.655,26.77 r270 top locked
J8 "MMCX-J-P-H-ST-TH1" SAMTEC_MMCX-J-P-H-ST-TH1 47.9,94 r0 top
R1 "100" RESC1005X40N 43,87.7 r90 top
R2 "100k" RESC1005X40N 46.9,90.8 r90 top
TR1 "TC2-1TX+" XFMR_MINI-CIRCUITS_AT1521 46.3,87.7 r90 top

## Footprints (in the part's own frame and the unit in brackets; to place one, negate y for a bottom-side part, rotate by r counter-clockwise, add the part's x,y. Pads: shape width x height; smd on the part's side, far side on the other; paste and mask are expansions set on the pad)
3M_N2530-6002RB [mm] "30 Contacts - Straight .100\" x .100\" Low Profile Four-Wall Header"
  round 1.6 hole 1: 1(-17.78,-1.27) 2(-17.78,1.27) 3(-15.24,-1.27) 4(-15.24,1.27) 5(-12.7,-1.27) 6(-12.7,1.27) 7(-10.16,-1.27) 8(-10.16,1.27) 9(-7.62,-1.27) 10(-7.62,1.27) 11(-5.08,-1.27) 12(-5.08,1.27) 13(-2.54,-1.27) 14(-2.54,1.27) 15(0,-1.27) 16(0,1.27) 17(2.54,-1.27) 18(2.54,1.27) 19(5.08,-1.27) 20(5.08,1.27) 21(7.62,-1.27) 22(7.62,1.27) 23(10.16,-1.27) 24(10.16,1.27) 25(12.7,-1.27) 26(12.7,1.27) 27(15.24,-1.27) 28(15.24,1.27) 29(17.78,-1.27) 30(17.78,1.27)
  silkscreen extent -22.71,-4.85 22.71,4.52, body extent -22.71,-4.11 22.71,4.52, height 9.91
CAPC0603X33N [mm] "Chip Capacitor, Body 0.6x0.30mm, IPC Medium Density"
  rect 0.45x0.4 smd: 1(-0.35,0) 2(0.35,0)
  body extent -0.31,-0.16 0.32,0.17, height 0.33
CAPC1005X50N [mm] "Chip Capacitor, Body 1.0x0.55mm, IPC Medium Density"
  rect 0.57x0.68 smd: 1(-0.49,0) 2(0.49,0)
  body extent -0.5,-0.27 0.5,0.28, height 0.5
CAPC1005X55N [mm] "Chip Capacitor, Body 1.0x0.55mm, IPC Medium Density"
  rect 0.62x0.62 smd: 1(-0.45,0) 2(0.45,0)
  body extent -0.52,-0.27 0.53,0.28, height 0.55
DIOM5336X265N [mm] "DO-214-AA/SMB Diode, Molded Body; 5.34mm L X 3.625mm W X 2.65mm H, IPC Medium Density"
  rect 2.3x2.15 smd: 1(-2.15,0) 2(2.15,0)
  silkscreen extent -3.92,-1.8 2.65,1.8, body extent -2.7,-1.95 2.7,1.95, height 2.4
FIL_MURATA_BNX02 [mm] "Block Type EMIFIL LC Combined Type, BNX02* Series"
  rect 3.8x2.5 smd: 1(-6.85,2.1) 2(6.85,2.1) 3(-6.85,-2.2) 4(6.85,-2.2)
  rect 7.9x2.3 smd: 4(1,-5.1)
  rect 3.4x2.3 smd: 4(3.25,5.1)
  silkscreen extent -5.95,-4.45 7.77,5.05, body extent -6.05,-4.55 6.05,4.55, height 3.1
"HARTING_09 73 296 6801" [mm] "Connector; DIN 41612, Type R, Thru-Hole; Rows a+b+c, 96 Position; Right Angle"
  round 1.7 hole 1: a1(0,0) a2(0,-2.54) a3(0,-5.08) a4(0,-7.62) a5(0,-10.16) a6(0,-12.7) a7(0,-15.24) a8(0,-17.78) a9(0,-20.32) a10(0,-22.86) a11(0,-25.4) a12(0,-27.94) a13(0,-30.48) a14(0,-33.02) a15(0,-35.56) a16(0,-38.1) a17(0,-40.64) a18(0,-43.18) a19(0,-45.72) a20(0,-48.26) a21(0,-50.8) a22(0,-53.34) a23(0,-55.88) a24(0,-58.42) a25(0,-60.96) a26(0,-63.5) a27(0,-66.04) a28(0,-68.58) a29(0,-71.12) a30(0,-73.66) a31(0,-76.2) a32(0,-78.74) b1(-2.54,0) b2(-2.54,-2.54) b3(-2.54,-5.08) b4(-2.54,-7.62) b5(-2.54,-10.16) b6(-2.54,-12.7) b7(-2.54,-15.24) b8(-2.54,-17.78) b9(-2.54,-20.32) b10(-2.54,-22.86) b11(-2.54,-25.4) b12(-2.54,-27.94) b13(-2.54,-30.48) b14(-2.54,-33.02) b15(-2.54,-35.56) b16(-2.54,-38.1) b17(-2.54,-40.64) b18(-2.54,-43.18) b19(-2.54,-45.72) b20(-2.54,-48.26) b21(-2.54,-50.8) b22(-2.54,-53.34) b23(-2.54,-55.88) b24(-2.54,-58.42) b25(-2.54,-60.96) b26(-2.54,-63.5) b27(-2.54,-66.04) b28(-2.54,-68.58) b29(-2.54,-71.12) b30(-2.54,-73.66) b31(-2.54,-76.2) b32(-2.54,-78.74) c1(-5.08,0) c2(-5.08,-2.54) c3(-5.08,-5.08) c4(-5.08,-7.62) c5(-5.08,-10.16) c6(-5.08,-12.7) c7(-5.08,-15.24) c8(-5.08,-17.78) c9(-5.08,-20.32) c10(-5.08,-22.86) c11(-5.08,-25.4) c12(-5.08,-27.94) c13(-5.08,-30.48) c14(-5.08,-33.02) c15(-5.08,-35.56) c16(-5.08,-38.1) c17(-5.08,-40.64) c18(-5.08,-43.18) c19(-5.08,-45.72) c20(-5.08,-48.26) c21(-5.08,-50.8) c22(-5.08,-53.34) c23(-5.08,-55.88) c24(-5.08,-58.42) c25(-5.08,-60.96) c26(-5.08,-63.5) c27(-5.08,-66.04) c28(-5.08,-68.58) c29(-5.08,-71.12) c30(-5.08,-73.66) c31(-5.08,-76.2) c32(-5.08,-78.74)
  round 3.5 / inner round 3.5 / far side round 5.1 hole 2.8: MTG1(2.54,5.08) MTG2(2.54,-83.82)
  silkscreen extent 0.01,-86.32 12.69,7.58, body extent -5.38,-86.37 12.74,7.63, height 9.1
RESC1005X40N [mm] "Chip Resistor, EIA 0402, Metric 1005, Body 1.0x0.5mm, IPC Medium Density"
  rect 0.58x0.62 smd: 1(-0.47,0) 2(0.47,0)
  body extent -0.52,-0.27 0.53,0.28, height 0.4
SAMTEC_MMCX-J-P-H-ST-TH1 [mm] "Straight Through-hole 50 Ohm Micro Mini RF Jack, MMCX Serie"
  round 1.55 hole 0.85: 1(0,0) 2(-1.27,-1.27) 2(-1.27,1.27) 2(1.27,-1.27) 2(1.27,1.27)
  silkscreen extent -1.75,-1.75 1.75,1.75, body extent -1.75,-1.75 1.75,1.75, height 4.35
SWITCHCRAFT_L712RA [mm] "CONN PWR JACK 2.5X5.5MM SOLDER"
  round 2.5 hole 1.7: 1(-5.6,-3.3) 2(0,-6.6) 3(0,0)
  silkscreen extent -22,-8.84 -1.32,2.21, body extent -21.84,-8.89 1.51,2.14, height 13.9
XFMR_MINI-CIRCUITS_AT1521 [mm] "MINI-CIRCUITS RF Transformer, Case AT1521, Body 3.81X3.81mm"
  rect 0.76x1.65 smd: 1(-1.27,1.59) 2(0,1.59) 3(1.27,1.59) 4(1.27,-1.59) 6(-1.27,-1.59)
  silkscreen extent -2.3,-0.37 1.9,1.72, body extent -1.9,-1.9 1.91,1.91, height 4.06

## Part data
C1: library part CC0201_100NF_6.3V_10%_X5R, "Non-polarised capacitor", Case=0201, Manufacturer=GENERIC, Manufacturer1 ComponentHeight=0.33mm, Manufacturer1 Example=AVX, Manufacturer1 Part Number=02016D104KAT2A, Tolerance=±10%, Voltage=6.3V, Author="CERN DEM JLC", Component Type=Standard, CreateDate=2007-12-03, HelpURL=\\cern.ch\dfs\Applications\Altium\Datasheets\CC0201_X5R_AVX.pdf, LatestRevisionDate=2007-12-03, Manufacturer Part Number=CC0201_100NF_6.3V_10%_X5R, Mounted=Yes, Part Description="SMD Multilayer Chip Ceramic Capacitor", Part Number=CC0201_100NF_6.3V_10%_X5R, Pin Count=2, Sense=No, SMD=Yes, Socket=No, Status="Not Recommended", TC=X5R
C2 C3: library part CC0402_0.5PF_25V_0.05PF_AVX_04023J0R5ABSTR, "Non-polarised capacitor", Case=0402, Manufacturer=AVX, Manufacturer Part Number=04023J0R5ABSTR, Tolerance=±0.05pF, Voltage=25V, Author="CERN DEM JLC", ComponentHeight=0.5mm, Component Type=Standard, CreateDate=2017-02-22, HelpURL=\\cern.ch\dfs\Applications\Altium\Datasheets\CC0402_AVX_ACCU-P.pdf, LatestRevisionDate=2017-02-22, Mounted=Yes, Part Description="Thin-Film Chip Capacitors for RF Signal and Power Applications, Accu-P Series", Part Number=CC0402_0.5PF_25V_0.05PF_AVX_04023J0R5ABSTR, Pin Count=2, Sense=No, SMD=Yes, Socket=No, Status=None
C4 C5: library part CC0402_10NF_16V_10%_X7R, "Non-polarised capacitor", Case=0402, Manufacturer=GENERIC, Manufacturer1 ComponentHeight=0.55mm, Manufacturer1 Example=PHYCOMP, Manufacturer1 Part Number=223878715636, Tolerance=±10%, Voltage=16V, Author="CERN DEM JLC", Component Type=Standard, CreateDate=03.12.2007, HelpURL=\\cern.ch\dfs\Applications\Altium\Datasheets\CC0402_X7R_PHYCOMP.pdf, LatestRevisionDate=03.12.2007, Manufacturer Part Number=CC0402_10NF_16V_10%_X7R, Mounted=Yes, Part Description="SMD Multilayer Chip Ceramic Capacitor", Part Number=CC0402_10NF_16V_10%_X7R, Pin Count=2, Sense=No, SMD=Yes, Socket=No, Status="Not Recommended", TC=X7R
D1: "Zener Diode", Case=DO-214AA, Manufacturer="FAIRCHILD SEMICONDUCTOR", Power=600W, Voltage=12V, Author="CERN DEM JLC", Bonding=No, ComponentHeight=2.65mm, Component Type=Standard, CreateDate=10.04.2013, Device=SMBJ12A, HelpURL=\\cern.ch\dfs\Applications\Altium\Datasheets\SMBJ.pdf, LatestRevisionDate=10.04.2013, Manufacturer Part Number=SMBJ12A, Mounted=Yes, PackageDescription="DO-214-AA/SMB Diode, Molded Body; 5.34mm L X 3.625mm W X 2.65mm H, IPC Medium Density", Part Description="Uni-Directional Transient Voltage Suppressor Diode", Part Number=SMBJ12A, Pin Count=2, PressFit=No, Sense=No, SMD=Yes, Socket=No
FL1: library part FIL_MURATA_BNX022-01L, "Block Type EMIFIL (LC Combined)", Manufacturer=MURATA, Manufacturer Part Number=BNX022-01L, Resistance=0.5R, Author="CERN DEM JLC", ComponentHeight=3.3mm, Component Type=Standard, CreateDate=10.10.2012, HelpURL=\\cern.ch\dfs\Applications\Altium\Datasheets\FIL_MURATA_BNX022-01L.pdf, LatestRevisionDate=10.10.2012, Mounted=Yes, Part Description="Block Type EMIFIL (LC Combined) SMD Type, BNX02* Series", Part Number=FIL_MURATA_BNX022-01L, Pin Count=2, Sense=No, SMD=Yes, Socket=No, Status=None
J1: library part "HARTING_09 73 296 6801", "Connector 96abc Female (3x32)", Manufacturer=HARTING, Manufacturer Part Number="09 73 296 6801", Author="CERN DEM JLC", ComponentHeight=9.5mm, Component Type=Standard, CreateDate=22.07.2008, Family="DIN 41612 Type R", HelpURL="\\cern.ch\dfs\Applications\Altium\Datasheets\HARTING_09 73 296 6801.pdf", LatestRevisionDate=22.07.2008, Mounted=Yes, Part Description="DIN 41612, Type R, 96 Position, Rows a+b+c, Performance level 2, Right Angle Female Connector, Lead 3.0 mm, Pitch 2.54mm", Part Number="HARTING_09 73 296 6801", Pin Count=98, PressFit=No, Sense=No, SMD=No, Socket=No, Status=None
J2 J3: "24V /3. 5A, 2.1mm Diameter Pin, SMD DC Power Supply Connector With  Break Contact", Manufacturer=SWITCHCRAFT, Manufacturer Part Number=712RA, Part Number=SWITCHCRAFT_712RA, Author=GK, ClassName=Connectors, ComponentHeight=11mm, Component Type=Standard, CreateDate=15.02.2011, Family=Jack, HelpURL=\\cern.ch\dfs\Applications\Altium\Datasheets\LUMBERG_161314.pdf, LatestRevisionDate=20.07.2011, Mounted=Yes, Part Description="12V/5A, 2.5mm Diameter Pin, THT DC Power Supply Connector With  Break Contact", Pin Count=3, PressFit=No, Sense=No, SMD=No, Socket=No, Status=None
J4 J5 J6 J7: library part 3M_N2530-6002RB, "Connector 30 Male", Manufacturer=3M, Manufacturer Part Number=N2530-6002RB, Author="CERN DEM JLC", ComponentHeight=10.03mm, Component Type=Standard, CreateDate=11.02.2009, Family="Header 30", HelpURL=\\cern.ch\dfs\Applications\Altium\Datasheets\3M_N2530-6002RB.pdf, LatestRevisionDate=11.08.2009, Mounted=Yes, Part Description="30 Contacts - Straight .100'' x .100'' Low Profile Four-Wall Header, 2500 Series", Part Number=3M_N2530-6002RB, Pin Count=30, PressFit=No, Sense=No, SMD=No, Socket=No, Status=None
J8: library part SAMTEC_MMCX-J-P-H-ST-TH1, Manufacturer=SAMTEC, Author="CERN DEM JLC", ComponentHeight=4.35mm, Component Type=Standard, CreateDate=05.12.2012, HelpURL=\\cern.ch\dfs\Applications\Altium\Datasheets\SAMTEC_MMCX-J-P-H-ST-TH1.pdf, LatestRevisionDate=05.12.2012, Manufacturer Part Number=MMCX-J-P-H-ST-TH1, Mounted=Yes, Part Description="Straight Through-hole 50 Ohm Micro Mini RF Jack, MMCX Series", Part Number=SAMTEC_MMCX-J-P-H-ST-TH1, Pin Count=2, PressFit=No, Sense=No, SMD=No, Socket=No, Status=None
R1: library part R0402_100R_1%_0.0625W_100PPM, "Resistor - 1%", Case=0402, Manufacturer=GENERIC, Manufacturer1 ComponentHeight=0.4mm, Manufacturer1 Example="YAGEO PHYCOMP", Manufacturer1 Part Number=232270671001L, Power=0.0625W, Tolerance=±1%, Author="CERN DEM JLC", Component Type=Standard, CreateDate=03.12.2007, HelpURL=\\cern.ch\dfs\Applications\Altium\Datasheets\R0402_Phycomp_RC0402.pdf, LatestRevisionDate=17.10.2012, Manufacturer Part Number=R0402_100R_1%_0.0625W_100PPM, Mounted=Yes, Part Description="General Purpose Thick Film Chip Resistor", Part Number=R0402_100R_1%_0.0625W_100PPM, Pin Count=2, PressFit=No, Sense=No, SMD=Yes, Socket=No, Status="Not Recommended", TC=±100ppm/°C
R2: library part R0402_100K_1%_0.0625W_100PPM, "Resistor - 1%", Case=0402, Manufacturer=GENERIC, Manufacturer1 ComponentHeight=0.4mm, Manufacturer1 Example="YAGEO PHYCOMP", Manufacturer1 Part Number=232270671004L, Power=0.0625W, Tolerance=±1%, Author="CERN DEM JLC", Component Type=Standard, CreateDate=03.12.2007, HelpURL=\\cern.ch\dfs\Applications\Altium\Datasheets\R0402_Phycomp_RC0402.pdf, LatestRevisionDate=17.10.2012, Manufacturer Part Number=R0402_100K_1%_0.0625W_100PPM, Mounted=Yes, Part Description="General Purpose Thick Film Chip Resistor", Part Number=R0402_100K_1%_0.0625W_100PPM, Pin Count=2, PressFit=No, Sense=No, SMD=Yes, Socket=No, Status="Not Recommended", TC=±100ppm/°C
TR1: library part XFMR_MINI-CIRCUITS_TC2-1TX+, "50 Ohm 3 to 300MHz RF Transformers", Manufacturer=MINI-CIRCUITS, HelpURL=https://ww2.minicircuits.com/pdfs/TC2-1TX+.pdf, Manufacturer Part Number=TC2-1TX+

## Via types
v1: diameter 0.8, hole 0.5, TopLayer to BottomLayer, tented both sides, 37 vias
v2: diameter 0.5, hole 0.2, TopLayer to BottomLayer, tented both sides, 5 vias

## Nets (pads, with @x,y where several pads share a name; then routed paths per layer and width w, separated by ;. In a path a pad name is that pad's centre, name@x,y a point inside that pad or via, vN(x,y) a via of type N, cw(c..) or ccw(c..) an arc to the next point about the centre after c; other vN are vias at no path point)
CLK_EXT_N: C3.1 J1.b30 R1.1 TR1.1 | length 48.9
  TopLayer w0.095: J1.b30@8.64,84.26 8.685,84.26 9.929,83.016 10.1,82.844 10.712,82.844 10.714,82.846 11.646,82.846 11.648,82.844 12.264,82.844 16.019,86.599 16.019,91.965 18.339,94.285 35.695,94.285 39.455,90.525 39.455,89.244 41.109,87.59 41.525,87.59 C3.1@41.9,87.215 42.275,87.59 42.64,87.59 R1.1@43,87.23 43.47,87.23 44.27,86.43 TR1.1@44.71,86.43
CLK_EXT_P: C2.2 J1.c30 R1.2 TR1.3 | length 48.7
  TopLayer w0.095: J1.c30@11.18,84.26 10.835,84.26 10.02,83.445 10.02,83.236 10.192,83.064 10.621,83.064 10.622,83.066 11.738,83.066 11.739,83.064 12.173,83.064 15.799,86.69 15.799,92.056 18.248,94.505 35.786,94.505 39.675,90.616 39.675,89.335 41.2,87.81 41.525,87.81 C2.2@41.9,88.185 42.275,87.81 42.64,87.81 R1.2@43,88.17 43.47,88.17 44.27,88.97 TR1.3@44.71,88.97
EXT8.LVDS_0_N: J1.a27 J4.3 | length 25.3
  TopLayer w0.127: J1.a27@6.1,76.64 7.243,77.783 9.217,77.783 10.038,78.603 10.038,79.653 10.709,80.324 12.281,80.324 17.602,85.645 17.602,88.494 18.974,89.865 21.96,89.865 22.05,89.775 22.05,89.7 J4.3@21.035,88.685
EXT8.LVDS_0_P: J1.a28 J4.2 | length 25.3
  TopLayer w0.127: J1.a28@6.1,79.18 7.243,78.037 9.112,78.037 9.784,78.709 9.784,79.758 10.604,80.578 12.176,80.578 17.348,85.75 17.348,88.599 18.869,90.119 22.034,90.119 J4.2@23.14,91.225
EXT8.LVDS_1_N: J1.b27 J4.6 | length 25.7
  BottomLayer w0.127: J1.b27@8.64,76.64 9.783,77.783 12.958,77.783 13.13,77.955 ccw(c12.725,78.359) 13.297,78.359 ccw(c12.725,78.359) 13.13,78.763 13.073,78.819 cw(c13.298,79.044) 13.073,79.268 cw(c13.298,79.044) 13.522,79.268 14.263,78.527 ccw(c14.667,78.931) 15.072,78.527 ccw(c14.667,78.931) 15.239,78.931 ccw(c14.667,78.931) 15.072,79.336 ; 15.072,79.335 14.331,80.077 cw(c14.555,80.301) 14.331,80.526 cw(c14.555,80.301) 14.78,80.526 15.521,79.784 ccw(c15.925,80.189) 16.329,79.785 ccw(c15.925,80.189) 16.496,80.189 ccw(c15.925,80.189) 16.329,80.593 ; 16.329,80.593 16.273,80.649 cw(c16.497,80.873) 16.273,81.098 16.993,81.818 16.993,82.169 17.09,82.267 ccw(c16.686,82.671) 17.257,82.671 ccw(c16.686,82.671) 17.09,83.075 17.034,83.131 cw(c17.258,83.355) 17.034,83.58 cw(c17.258,83.355) 17.483,83.58 17.539,83.524 ccw(c17.943,83.928) 18.347,83.524 19.52,84.696 20.147,84.696 20.148,84.697 21.052,84.697 21.053,84.696 21.578,84.696 23.027,86.145 J4.6@23.14,86.145
EXT8.LVDS_1_P: J1.b28 J4.5 | length 25.1
  BottomLayer w0.127: J1.b28@8.64,79.18 9.783,78.037 12.852,78.037 12.95,78.134 ccw(c12.725,78.359) 13.043,78.359 ccw(c12.725,78.359) 12.95,78.583 12.894,78.64 cw(c13.298,79.044) 12.894,79.448 cw(c13.298,79.044) 13.702,79.448 ; 13.702,79.448 14.443,78.707 ccw(c14.667,78.931) 14.892,78.707 ccw(c14.667,78.931) 14.985,78.931 ccw(c14.667,78.931) 14.892,79.156 14.151,79.897 cw(c14.555,80.301) 14.151,80.705 cw(c14.555,80.301) 14.959,80.705 15.7,79.964 ccw(c15.925,80.189) 16.149,79.964 ccw(c15.925,80.189) 16.242,80.189 ccw(c15.925,80.189) 16.149,80.413 16.093,80.469 cw(c16.497,80.873) 16.093,81.278 16.739,81.923 16.739,82.274 16.911,82.446 ccw(c16.686,82.671) 17.003,82.671 ccw(c16.686,82.671) 16.911,82.895 16.854,82.951 cw(c17.258,83.355) 16.854,83.76 cw(c17.258,83.355) 17.663,83.76 ; 17.662,83.76 17.719,83.703 ccw(c17.943,83.928) 18.168,83.703 19.416,84.951 21.449,84.951 ; J4.5@20.6,86.145 20.713,86.145 21.579,85.279 21.579,85.079 21.45,84.95
EXT8.LVDS_2_N: J1.c27 J4.9 | length 25.1
  TopLayer w0.127: J1.c27@11.18,76.64 12.323,77.783 13.948,77.783 14.12,77.955 ccw(c13.716,78.359) 14.287,78.359 ccw(c13.716,78.359) 14.12,78.763 13.851,79.033 cw(c14.075,79.257) 13.851,79.482 cw(c14.075,79.257) 14.3,79.482 15.467,78.314 ; 15.467,78.314 ccw(c15.871,78.718) 16.275,78.314 ccw(c15.871,78.718) 16.443,78.718 ccw(c15.871,78.718) 16.275,79.122 15.108,80.29 cw(c15.332,80.514) 15.108,80.739 cw(c15.332,80.514) 15.557,80.739 16.724,79.571 ccw(c17.128,79.975) 17.533,79.571 ccw(c17.128,79.975) 17.7,79.975 ccw(c17.128,79.975) 17.533,80.38 16.365,81.547 cw(c16.59,81.771) 16.365,81.996 cw(c16.59,81.771) 16.814,81.996 17.084,81.727 ccw(c17.488,82.131) 17.892,81.727 18.424,82.259 21.916,82.259 22.025,82.15 22.025,82.05 J4.9@21.04,81.065
EXT8.LVDS_2_P: J1.c28 J4.8 | length 25.2
  TopLayer w0.127: J1.c28@11.18,79.18 12.323,78.037 13.843,78.037 13.941,78.134 ccw(c13.716,78.359) 14.033,78.359 ccw(c13.716,78.359) 13.941,78.583 13.671,78.853 cw(c14.075,79.257) 13.671,79.661 cw(c14.075,79.257) 14.479,79.661 15.647,78.494 ccw(c15.871,78.718) 16.096,78.494 ccw(c15.871,78.718) 16.189,78.718 ccw(c15.871,78.718) 16.096,78.943 14.928,80.11 ; 14.928,80.11 cw(c15.332,80.514) 14.928,80.918 cw(c15.332,80.514) 15.737,80.918 16.904,79.751 ccw(c17.128,79.975) 17.353,79.751 ccw(c17.128,79.975) 17.446,79.975 ccw(c17.128,79.975) 17.353,80.2 16.186,81.367 cw(c16.59,81.771) 16.186,82.176 cw(c16.59,81.771) 16.994,82.176 17.263,81.906 ccw(c17.488,82.131) 17.712,81.906 18.319,82.513 22.048,82.513 J4.8@23.14,83.605
EXT8.LVDS_3_N: J1.a25 J4.12 | length 25.6
  TopLayer w0.127: J1.a25@6.1,71.56 7.243,72.703 9.217,72.703 10.038,73.523 10.038,74.573 10.709,75.244 12.525,75.244 ccw(c12.525,75.815) 13.096,75.815 13.096,76.027 cw(c13.414,76.027) 13.731,76.027 13.731,74.715 ccw(c14.303,74.715) 14.874,74.715 14.874,76.027 cw(c15.192,76.027) 15.509,76.027 15.509,75.815 ccw(c16.081,75.815) 16.081,75.244 17.797,75.244 19.63,77.077 21.734,77.077 21.927,77.27 23.14,78.483 J4.12@23.14,78.525
EXT8.LVDS_3_P: J1.a26 J4.11 | length 25.1
  TopLayer w0.127: J1.a26@6.1,74.1 7.243,72.957 9.112,72.957 9.784,73.629 9.784,74.678 10.604,75.498 12.525,75.498 ccw(c12.525,75.815) 12.842,75.815 12.842,76.027 cw(c13.414,76.027) 13.985,76.027 13.985,74.715 ccw(c14.303,74.715) 14.62,74.715 14.62,76.027 cw(c15.192,76.027) 15.763,76.027 15.763,75.815 ccw(c16.081,75.815) 16.081,75.498 17.692,75.498 19.525,77.331 21.629,77.331 21.748,77.45 21.748,77.569 J4.11@20.792,78.525
EXT8.LVDS_4_N: J1.b25 J4.15 | length 25.5
  BottomLayer w0.127: J1.b25@8.64,71.56 9.784,72.704 12.48,72.704 12.548,72.771 14.395,74.619 14.975,74.619 ccw(c14.975,75.19) 15.546,75.19 15.546,75.715 cw(c15.864,75.715) 16.181,75.715 16.181,73.777 ccw(c16.753,73.777) 17.324,73.777 17.324,75.715 cw(c17.642,75.715) 17.959,75.715 17.959,73.777 ccw(c18.531,73.777) 19.102,73.777 19.102,74.301 cw(c19.42,74.301) 19.42,74.619 21.618,74.619 21.75,74.487 21.75,74.325 20.87,73.445 J4.15@20.6,73.445
EXT8.LVDS_4_P: J1.b26 J4.14 | length 25.6
  BottomLayer w0.127: J1.b26@8.64,74.1 9.782,72.958 12.375,72.958 14.29,74.873 14.975,74.873 ccw(c14.975,75.19) 15.292,75.19 15.292,75.715 cw(c15.864,75.715) 16.435,75.715 16.435,73.777 ccw(c16.753,73.777) 17.07,73.777 17.07,75.715 cw(c17.642,75.715) 18.213,75.715 18.213,73.777 ccw(c18.531,73.777) 18.848,73.777 18.848,74.301 cw(c19.42,74.301) 19.42,74.873 21.618,74.873 22.028,74.873 J4.14@23.14,75.985
EXT8.LVDS_5_N: J1.c25 J4.18 | length 24.8
  TopLayer w0.127: J1.c25@11.18,71.56 12.323,72.703 13.208,72.703 13.306,72.605 ; 13.306,72.605 ccw(c13.71,73.01) 14.114,72.605 14.383,72.875 cw(c14.608,72.65) 14.832,72.875 cw(c14.608,72.65) 14.925,72.65 cw(c14.608,72.65) 14.832,72.426 13.664,71.258 ; 13.665,71.258 ccw(c14.069,70.854) 13.665,70.45 ccw(c14.069,70.854) 14.473,70.45 15.64,71.618 cw(c15.865,71.393) 16.089,71.618 cw(c15.865,71.393) 16.182,71.393 cw(c15.865,71.393) 16.089,71.169 15.82,70.899 ccw(c16.224,70.495) 15.82,70.091 ; 15.82,70.091 16.454,69.457 16.697,69.457 ccw(c16.697,70.029) 17.268,70.029 17.268,70.41 cw(c17.586,70.41) 17.903,70.41 17.903,68.759 ccw(c18.475,68.759) 19.046,68.759 19.046,69.835 cw(c19.364,69.835) 19.681,69.835 ccw(c20.059,69.835) 20.059,69.457 21.517,69.457 21.77,69.709 21.77,69.802 J4.18@22.508,70.54
EXT8.LVDS_5_P: J1.c26 J4.17 | length 24.8
  TopLayer w0.127: J1.c26@11.18,74.1 12.323,72.957 13.313,72.957 13.485,72.785 ccw(c13.71,73.01) 13.934,72.785 14.204,73.054 cw(c14.608,72.65) 15.012,73.054 cw(c14.608,72.65) 15.179,72.65 cw(c14.608,72.65) 15.012,72.246 13.844,71.079 ccw(c14.069,70.854) 13.844,70.63 ccw(c14.069,70.854) 14.293,70.63 15.461,71.797 cw(c15.865,71.393) 16.269,71.797 cw(c15.865,71.393) 16.436,71.393 cw(c15.865,71.393) 16.269,70.989 16,70.72 ccw(c16.224,70.495) 16,70.271 16.559,69.711 16.697,69.711 ccw(c16.697,70.029) 17.014,70.029 17.014,70.41 cw(c17.586,70.41) 18.157,70.41 18.157,68.759 ccw(c18.475,68.759) 18.792,68.759 18.792,69.835 cw(c19.364,69.835) 19.935,69.835 ccw(c20.059,69.835) 20.059,69.711 21.412,69.711 21.516,69.815 21.516,69.989 J4.17@20.6,70.905
EXT8.LVDS_6_N: J1.a23 J4.21 | length 33.3
  TopLayer w0.127: J1.a23@6.1,66.48 7.244,67.624 ; J4.21@20.6,65.825 20.65,65.825 21.611,66.786 21.611,66.914 21.506,67.019 19.775,67.019 ccw(c19.775,66.701) 19.457,66.701 19.457,66.307 cw(c18.886,66.307) 18.314,66.307 18.314,67.246 ccw(c17.997,67.246) 17.679,67.246 17.679,66.307 cw(c17.108,66.307) 16.536,66.307 16.536,66.701 ccw(c16.219,66.701) 16.219,67.019 15.832,67.019 13.333,69.518 ; 7.244,67.624 9.218,67.624 ; 7.244,67.624 9.218,67.624 ; 9.218,67.624 10.038,68.443 ; 9.218,67.624 10.038,68.443 ; 10.038,68.443 10.038,69.493 ; 10.038,68.443 10.038,69.493 ; 10.038,69.493 10.707,70.162 ; 10.038,69.493 10.707,70.162 ; 10.707,70.162 12.689,70.162 ; 10.707,70.162 12.689,70.162 ; 12.689,70.162 13.333,69.518 ; 12.689,70.162 13.333,69.518
EXT8.LVDS_6_P: J1.a24 J4.20 | length 25.6
  TopLayer w0.127: J1.a24@6.1,69.02 7.242,67.878 9.113,67.878 9.784,68.549 9.784,69.598 10.602,70.416 12.794,70.416 13.513,69.698 15.937,67.273 16.219,67.273 cw(c16.219,66.701) 16.79,66.701 16.79,66.307 ccw(c17.108,66.307) 17.425,66.307 17.425,67.246 cw(c17.997,67.246) 18.568,67.246 18.568,66.307 ccw(c18.886,66.307) 19.203,66.307 19.203,66.701 cw(c19.775,66.701) 19.775,67.273 21.506,67.273 22.048,67.273 J4.20@23.14,68.365
EXT8.LVDS_7_N: J1.b23 J4.24 | length 25.5
  BottomLayer w0.127: J1.b23@8.64,66.48 9.783,67.623 12.311,67.623 12.68,67.254 ccw(c13.084,67.659) 13.488,67.254 13.937,67.703 cw(c14.161,67.479) 14.386,67.703 cw(c14.161,67.479) 14.479,67.479 cw(c14.161,67.479) 14.386,67.254 12.859,65.728 ccw(c13.263,65.324) 12.859,64.92 ccw(c13.263,65.324) 13.667,64.92 ; 13.667,64.919 15.194,66.446 cw(c15.418,66.222) 15.643,66.446 cw(c15.418,66.222) 15.736,66.222 cw(c15.418,66.222) 15.643,65.997 15.194,65.548 ; 15.194,65.548 ccw(c15.598,65.144) 15.194,64.74 18.009,61.925 21.797,61.925 21.971,62.099 23.14,63.268 J4.24@23.14,63.285
EXT8.LVDS_7_P: J1.b24 J4.23 | length 25.3
  BottomLayer w0.127: J1.b24@8.64,69.02 9.783,67.877 12.416,67.877 12.859,67.434 ccw(c13.084,67.659) 13.308,67.434 13.757,67.883 cw(c14.161,67.479) 14.565,67.883 cw(c14.161,67.479) 14.733,67.479 cw(c14.161,67.479) 14.565,67.075 13.039,65.548 ccw(c13.263,65.324) 13.039,65.099 ccw(c13.263,65.324) 13.488,65.099 15.014,66.626 cw(c15.418,66.222) 15.822,66.626 cw(c15.418,66.222) 15.99,66.222 cw(c15.418,66.222) 15.822,65.818 15.373,65.369 ccw(c15.598,65.144) 15.373,64.92 18.114,62.179 21.692,62.179 21.791,62.278 21.791,62.384 20.89,63.285 J4.23@20.6,63.285
EXT9.LVDS_0_N: J1.a20 J5.3 | length 64.4
  TopLayer w0.127: J1.a20@6.1,58.86 7.243,60.003 9.217,60.003 10.038,60.823 10.038,61.873 10.707,62.542 12.591,62.542 18.11,57.023 18.274,56.859 24.528,56.859 25.07,57.4 25.07,85.522 29.297,89.749 34.201,89.749 34.327,89.623 34.327,89.402 33.48,88.555 J5.3@33.335,88.555
EXT9.LVDS_0_P: J1.a21 J5.2 | length 64.8
  TopLayer w0.127: J1.a21@6.1,61.4 7.243,60.257 9.112,60.257 9.784,60.929 9.784,61.978 10.602,62.796 12.696,62.796 18.379,57.113 24.423,57.113 24.816,57.506 24.816,85.627 29.192,90.003 34.201,90.003 34.783,90.003 J5.2@35.875,91.095
EXT9.LVDS_1_N: J1.b20 J5.6 | length 64.8
  BottomLayer w0.127: J1.b20@8.64,58.86 9.783,60.003 15.977,60.003 16.645,59.334 24.362,59.334 26.215,61.187 26.289,61.261 26.289,63.357 26.289,66 ccw(c25.717,66) 25.717,66.572 25.126,66.572 cw(c25.126,66.889) 25.126,67.207 25.717,67.207 ccw(c25.717,67.778) 26.289,67.778 26.289,68.373 26.289,68.564 cw(c26.607,68.564) 26.607,68.881 27.175,68.881 ccw(c27.175,69.453) 27.746,69.453 ccw(c27.175,69.453) 27.175,70.024 25.126,70.024 cw(c25.126,70.342) 25.126,70.659 27.175,70.659 ccw(c27.175,71.231) 27.746,71.231 ccw(c27.175,71.231) 27.175,71.802 25.126,71.802 cw(c25.126,72.12) 25.126,72.437 27.198,72.437 ccw(c27.198,73.009) 27.77,73.009 ccw(c27.198,73.009) 27.198,73.58 26.607,73.58 cw(c26.607,73.898) 26.289,73.898 26.289,80.311 30.545,84.567 34.427,84.567 J5.6@35.875,86.015
EXT9.LVDS_1_P: J1.b21 J5.5 | length 64.4
  BottomLayer w0.127: J1.b21@8.64,61.4 9.783,60.257 16.082,60.257 16.75,59.588 24.257,59.588 26.035,61.366 26.035,63.357 26.035,66 ccw(c25.717,66) 25.717,66.318 25.126,66.318 cw(c25.126,66.889) 25.126,67.461 25.717,67.461 ccw(c25.717,67.778) 26.035,67.778 26.035,68.373 26.035,68.564 cw(c26.607,68.564) 26.607,69.135 27.175,69.135 ccw(c27.175,69.453) 27.492,69.453 ccw(c27.175,69.453) 27.175,69.77 25.126,69.77 cw(c25.126,70.342) 25.126,70.913 27.175,70.913 ccw(c27.175,71.231) 27.492,71.231 ccw(c27.175,71.231) 27.175,71.548 25.126,71.548 cw(c25.126,72.12) 25.126,72.691 27.198,72.691 ccw(c27.198,73.009) 27.516,73.009 ccw(c27.198,73.009) 27.198,73.326 26.607,73.326 cw(c26.607,73.898) 26.035,73.898 26.035,80.416 30.44,84.821 34.311,84.821 34.425,84.936 34.425,85.05 J5.5@33.46,86.015 ; J5.5@33.335,86.015 J5.5@33.397,85.953
EXT9.LVDS_2_N: J1.c20 J5.9 | length 64.6
  TopLayer w0.127: J1.c20@11.18,58.86 12.323,60.003 12.624,60.003 13.263,59.363 ccw(c13.668,59.767) 14.072,59.363 14.257,59.549 cw(c14.482,59.324) 14.706,59.549 cw(c14.482,59.324) 14.799,59.324 cw(c14.482,59.324) 14.706,59.1 13.524,57.918 ccw(c13.928,57.514) 13.524,57.11 ccw(c13.928,57.514) 14.333,57.11 15.514,58.292 cw(c15.739,58.067) 15.963,58.292 cw(c15.739,58.067) 16.056,58.067 cw(c15.739,58.067) 15.963,57.843 14.781,56.661 ccw(c15.186,56.257) 14.782,55.853 ccw(c15.186,56.257) 15.59,55.853 16.772,57.034 cw(c16.996,56.81) 17.221,57.034 cw(c16.996,56.81) 17.314,56.81 cw(c16.996,56.81) 17.221,56.585 16.039,55.403 ccw(c16.443,54.999) 16.039,54.595 ccw(c16.443,54.999) 16.847,54.595 17.215,54.963 cw(c17.439,54.739) 17.664,54.963 18.449,54.178 24.667,54.178 26.67,56.181 26.67,77.546 31.242,82.118 34.357,82.118 34.45,82.025 34.45,81.9 33.485,80.935 J5.9@33.335,80.935
EXT9.LVDS_2_P: J1.c21 J5.8 | length 64.8
  TopLayer w0.127: J1.c21@11.18,61.4 12.323,60.257 12.729,60.257 13.443,59.543 ccw(c13.668,59.767) 13.892,59.543 14.078,59.729 cw(c14.482,59.324) 14.886,59.729 cw(c14.482,59.324) 15.053,59.324 cw(c14.482,59.324) 14.886,58.92 13.704,57.738 ccw(c13.928,57.514) 13.704,57.289 ccw(c13.928,57.514) 14.153,57.289 15.335,58.471 cw(c15.739,58.067) 16.143,58.471 cw(c15.739,58.067) 16.31,58.067 cw(c15.739,58.067) 16.143,57.663 14.961,56.481 ccw(c15.186,56.257) 14.961,56.032 ccw(c15.186,56.257) 15.41,56.032 16.592,57.214 cw(c16.996,56.81) 17.4,57.214 cw(c16.996,56.81) 17.568,56.81 cw(c16.996,56.81) 17.4,56.406 16.218,55.224 ccw(c16.443,54.999) 16.218,54.775 ccw(c16.443,54.999) 16.667,54.775 17.035,55.143 cw(c17.439,54.739) 17.843,55.143 18.554,54.432 24.562,54.432 26.416,56.286 26.416,77.651 31.137,82.372 34.357,82.372 34.772,82.372 J5.8@35.875,83.475
EXT9.LVDS_3_N: J1.a18 J5.12 | length 64.8
  TopLayer w0.127: J1.a18@6.1,53.78 7.243,54.923 9.217,54.923 10.038,55.743 10.038,56.793 10.707,57.462 12.134,57.462 17.374,52.222 18.375,52.222 ccw(c18.375,52.794) 18.947,52.794 18.947,53.346 cw(c19.264,53.346) 19.582,53.346 19.582,51.632 ccw(c20.153,51.632) 20.725,51.632 20.725,53.346 cw(c21.042,53.346) 21.36,53.346 21.36,51.632 ccw(c21.931,51.632) 22.503,51.632 22.503,51.905 cw(c22.82,51.905) 22.82,52.222 25.607,52.222 28.397,55.013 28.397,74.397 30.948,76.947 34.416,76.947 34.639,77.17 34.639,77.275 35.759,78.395 J5.12@35.875,78.395
EXT9.LVDS_3_P: J1.a19 J5.11 | length 64.3
  TopLayer w0.127: J1.a19@6.1,56.32 7.243,55.177 9.112,55.177 9.784,55.849 9.784,56.898 10.602,57.716 12.239,57.716 17.479,52.476 18.375,52.476 ccw(c18.375,52.794) 18.693,52.794 18.693,53.346 cw(c19.264,53.346) 19.836,53.346 19.836,51.632 ccw(c20.153,51.632) 20.471,51.632 20.471,53.346 cw(c21.042,53.346) 21.614,53.346 21.614,51.632 ccw(c21.931,51.632) 22.249,51.632 22.249,51.905 cw(c22.82,51.905) 22.82,52.476 25.502,52.476 28.143,55.118 28.143,74.502 30.707,77.065 30.843,77.201 34.311,77.201 34.385,77.275 34.385,77.462 33.451,78.395 J5.11@33.335,78.395
EXT9.LVDS_4_N: J1.b18 J5.15 | length 64.1
  BottomLayer w0.127: J1.b18@8.64,53.78 9.783,54.923 12.78,54.923 14.651,56.794 25.124,56.794 25.603,57.273 ccw(c25.198,57.677) 25.77,57.677 ccw(c25.198,57.677) 25.603,58.081 ; 25.602,58.081 25.153,58.53 cw(c25.378,58.754) 25.153,58.979 cw(c25.378,58.754) 25.602,58.979 26.694,57.887 ccw(c27.098,58.291) 27.502,57.887 ccw(c27.098,58.291) 27.67,58.291 ccw(c27.098,58.291) 27.502,58.695 26.411,59.787 cw(c26.635,60.012) 26.411,60.236 cw(c26.635,60.012) 26.86,60.236 27.309,59.787 ccw(c27.713,60.191) 28.117,59.787 28.296,59.966 28.296,60.65 ccw(c27.724,60.65) 27.724,61.222 27.112,61.222 cw(c27.112,61.539) 27.112,61.857 28.818,61.857 ccw(c28.818,62.428) 29.389,62.428 ccw(c28.818,62.428) 28.818,63 27.112,63 cw(c27.112,63.317) 27.112,63.635 29.248,63.635 ccw(c29.248,64.206) 29.82,64.206 ccw(c29.248,64.206) 29.248,64.778 27.112,64.778 cw(c27.112,65.095) 27.112,65.413 29.248,65.413 ccw(c29.248,65.984) 29.82,65.984 ccw(c29.248,65.984) 29.248,66.556 28.613,66.556 cw(c28.613,66.873) 28.296,66.873 28.296,72.06 30.745,74.509 34.266,74.509 34.425,74.35 34.425,74.175 33.565,73.315 J5.15@33.335,73.315
EXT9.LVDS_4_P: J1.b19 J5.14 | length 64.4
  BottomLayer w0.127: J1.b19@8.64,56.32 9.783,55.177 12.675,55.177 14.546,57.048 25.019,57.048 25.423,57.452 ccw(c25.198,57.677) 25.516,57.677 ccw(c25.198,57.677) 25.423,57.901 24.974,58.35 cw(c25.378,58.754) 24.974,59.158 cw(c25.378,58.754) 25.782,59.158 26.874,58.067 ccw(c27.098,58.291) 27.323,58.067 ccw(c27.098,58.291) 27.416,58.291 ccw(c27.098,58.291) 27.323,58.516 26.231,59.608 cw(c26.635,60.012) 26.231,60.416 cw(c26.635,60.012) 27.039,60.416 27.488,59.967 ccw(c27.713,60.191) 27.937,59.967 28.042,60.071 28.042,60.65 ccw(c27.724,60.65) 27.724,60.968 27.112,60.968 cw(c27.112,61.539) 27.112,62.111 28.818,62.111 ccw(c28.818,62.428) 29.135,62.428 ccw(c28.818,62.428) 28.818,62.746 27.112,62.746 cw(c27.112,63.317) 27.112,63.889 29.248,63.889 ccw(c29.248,64.206) 29.566,64.206 ccw(c29.248,64.206) 29.248,64.524 27.112,64.524 cw(c27.112,65.095) 27.112,65.667 29.248,65.667 ccw(c29.248,65.984) 29.566,65.984 ccw(c29.248,65.984) 29.248,66.302 28.613,66.302 cw(c28.613,66.873) 28.042,66.873 28.042,72.165 30.64,74.763 34.266,74.763 34.783,74.763 J5.14@35.875,75.855
EXT9.LVDS_5_N: J1.c18 J5.18 | length 63.9
  TopLayer w0.127: J1.c18@11.18,53.78 12.323,54.923 12.675,54.923 12.849,54.749 ccw(c13.253,55.153) 13.657,54.749 ; 13.67,54.762 cw(c13.894,54.537) 14.119,54.762 cw(c13.894,54.537) 14.212,54.537 cw(c13.894,54.537) 14.119,54.313 13.028,53.222 ccw(c13.433,52.818) 13.028,52.414 ccw(c13.433,52.818) 13.837,52.414 14.927,53.504 cw(c15.152,53.28) 15.376,53.504 cw(c15.152,53.28) 15.469,53.28 cw(c15.152,53.28) 15.376,53.055 14.285,51.965 ; 14.286,51.965 ccw(c14.69,51.561) 14.286,51.157 ccw(c14.69,51.561) 15.094,51.157 16.184,52.247 cw(c16.409,52.023) 16.633,52.247 cw(c16.409,52.023) 16.726,52.023 cw(c16.409,52.023) 16.633,51.798 ; 16.62,51.785 ccw(c17.025,51.381) 16.62,50.977 17.052,50.546 26.953,50.546 27.125,50.718 ; 27.125,50.718 ccw(c26.721,51.122) 27.292,51.122 ccw(c26.721,51.122) 27.125,51.526 26.676,51.975 cw(c26.9,52.2) 26.676,52.424 cw(c26.9,52.2) 27.125,52.424 28.652,50.898 ccw(c29.056,51.302) 29.46,50.898 ccw(c29.056,51.302) 29.627,51.302 ccw(c29.056,51.302) 29.46,51.706 27.933,53.232 cw(c28.158,53.457) 27.933,53.681 cw(c28.158,53.457) 28.382,53.681 28.831,53.232 ccw(c29.235,53.636) 29.639,53.232 30.201,53.794 30.201,54.275 ccw(c29.629,54.275) 29.629,54.846 29.221,54.846 cw(c29.221,55.164) 29.221,55.481 30.673,55.481 ccw(c30.673,56.053) 31.244,56.053 ccw(c30.673,56.053) 30.673,56.624 30.518,56.624 cw(c30.518,56.942) 30.201,56.942 30.201,67.793 31.735,69.327 34.427,69.327 34.63,69.53 J5.18@35.875,70.775
EXT9.LVDS_5_P: J1.c19 J5.17 | length 63.4